# EAGLE board Linux_Board_v895 (EAGLE 9.7.0), part 1 of 4
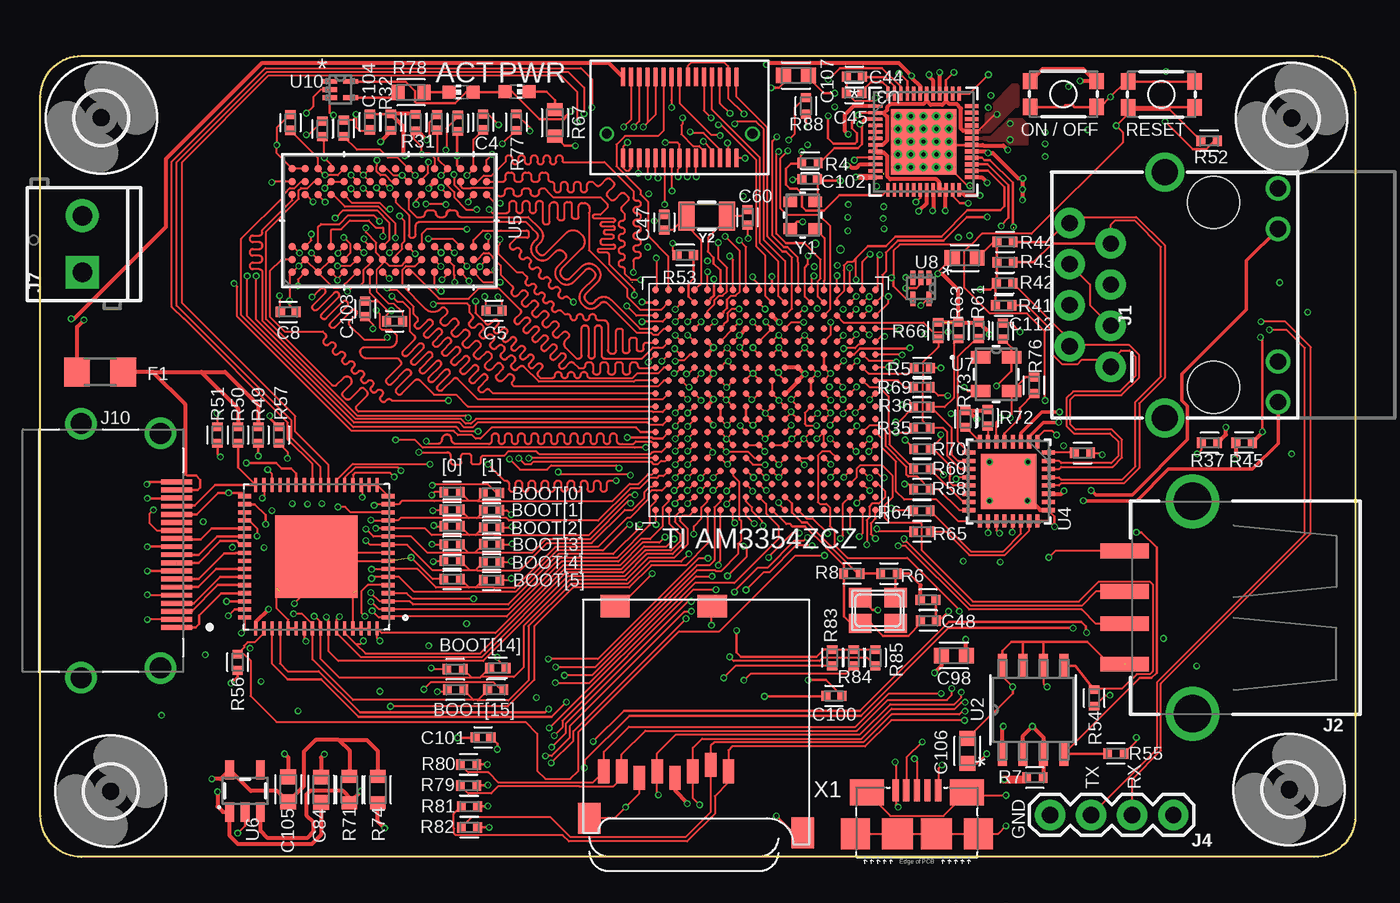
[diagram p0: board, top side]
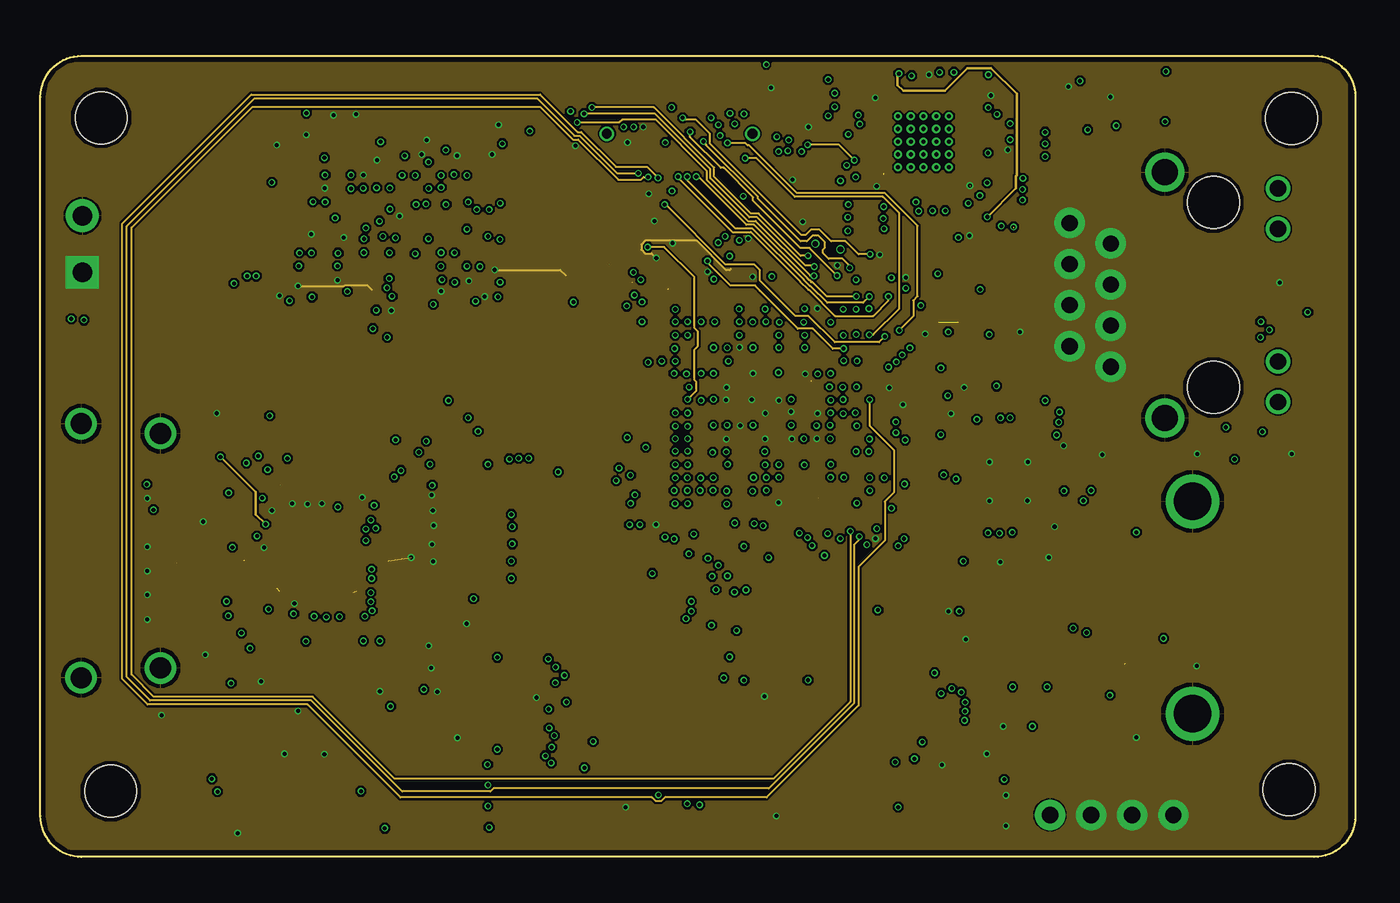
[diagram p1: board, inner layer Route2]
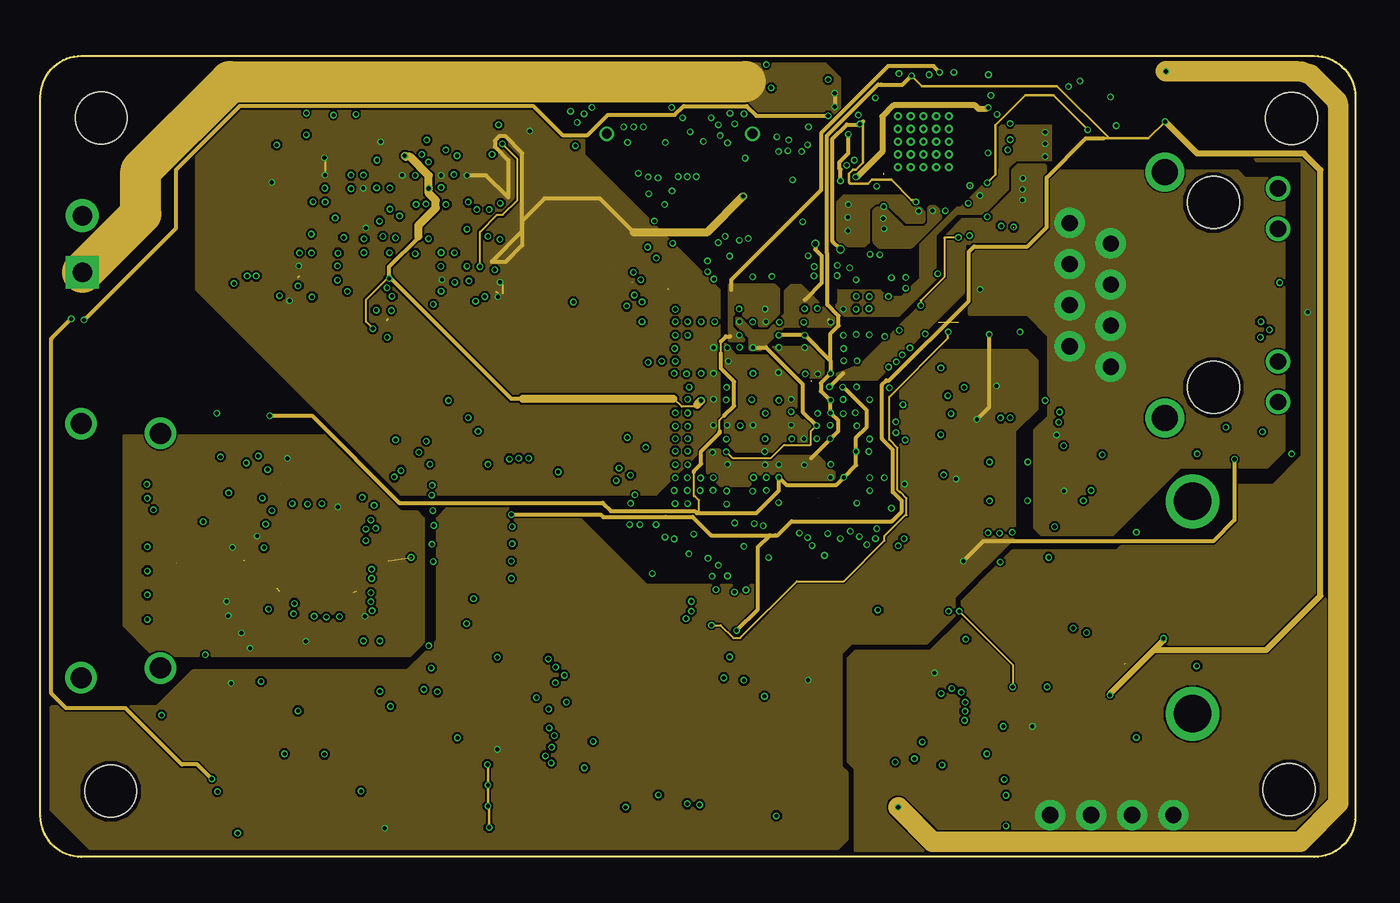
[diagram p2: board, inner layer Route15]
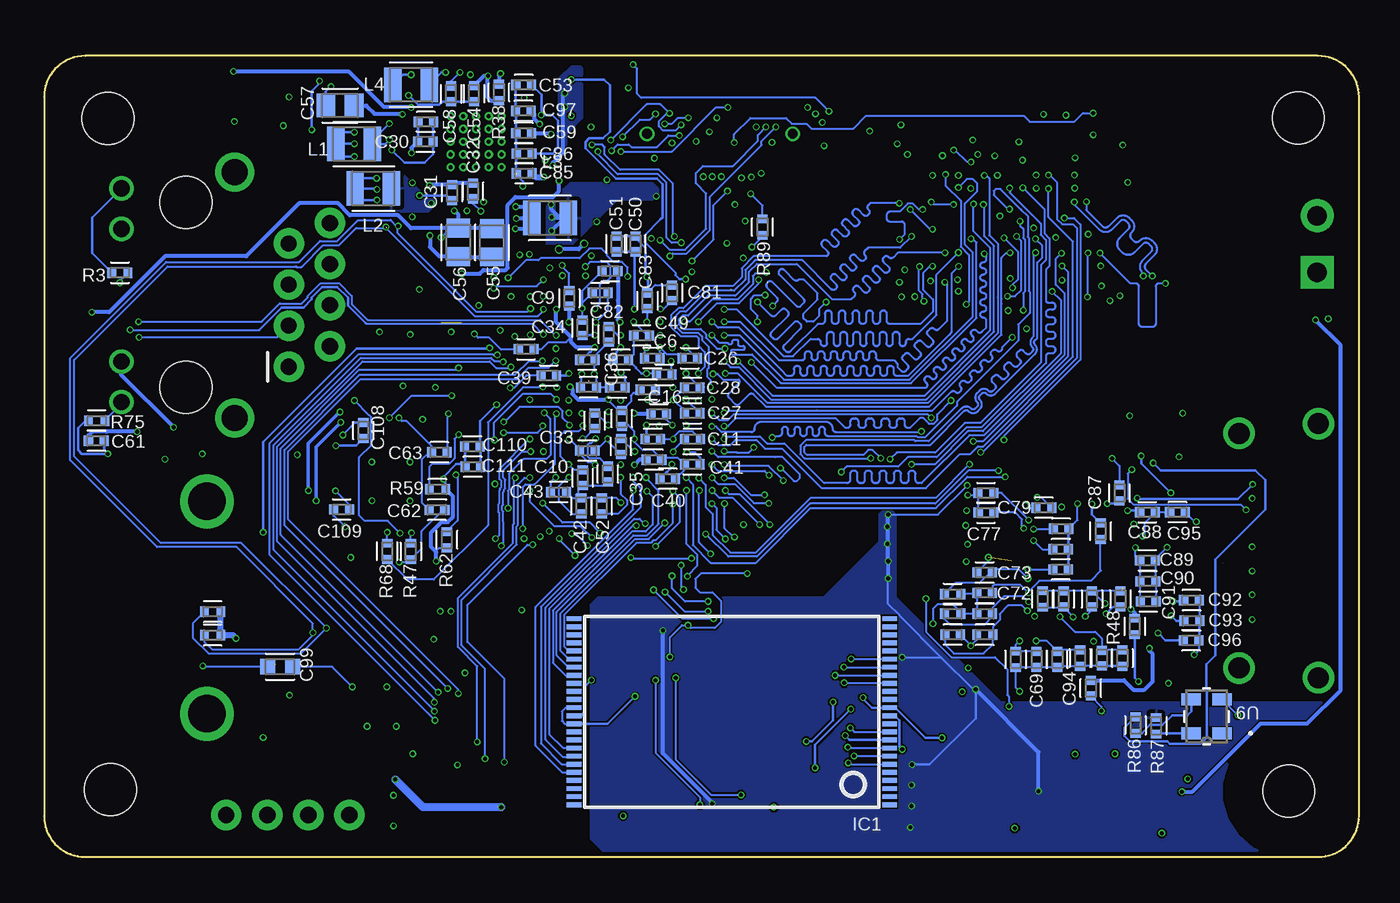
[diagram p3: board, bottom side, seen from below]

Size 81.28 x 49.53 mm. Coordinates in mm from the lower left corner, seen from the top.
Outline: 0,2.54 0,46.99 arc-90 2.54,49.53 78.74,49.53 arc-90 81.28,46.99 81.28,2.54 arc-90 78.74,0 2.54,0 arc-90 0,2.54
Copper layers (1+2*15+16): Top 0.035mm / dielectric 1.5mm / Route2 0.035mm / dielectric 0.15mm / Route15 0.035mm / dielectric 0.2mm / Bottom 0.035mm
Design rules "default *": minimum track width 4mil, minimum drill 10mil, track to track 4mil, track to pad 4mil, pad to pad 4mil, via to via 4mil, smd to smd 3mil, copper to edge 10mil, drill to drill 6mil, minimum pad ring 5mil, minimum via ring 3mil, stop-mask expansion 2mil, vias tented up to drill 25mil, thermal gap 10mil

## Footprints (pad centres in the part's own frame; a part is rotated, then mirrored left to right if it is on the bottom)
CAPC1005X60 = smd 0.56 x 0.629: 1 -0.485,0; 2 0.485,0
CAPC2012X110 = smd 1.165 x 1.465: 1 -0.875,0; 2 0.875,0
CAPC1608X85 = smd 0.921 x 0.97: 1 -0.775,0; 2 0.775,0
R1206 = smd 1.6 x 1.803: 1 -1.422,0; 2 1.422,0
3,2 = hole 3.2: 0,0
TSOP48 = smd 0.9 x 0.3: 1 -9.75,5.75; 2 -9.75,5.25; 3 -9.75,4.75; 4 -9.75,4.25; 5 -9.75,3.75; 6 -9.75,3.25; 7 -9.75,2.75; 8 -9.75,2.25; 9 -9.75,1.75; 10 -9.75,1.25; 11 -9.75,0.75; 12 -9.75,0.25; 13 -9.75,-0.25; 14 -9.75,-0.75; 15 -9.75,-1.25; 16 -9.75,-1.75; 17 -9.75,-2.25; 18 -9.75,-2.75; 19 -9.75,-3.25; 20 -9.75,-3.75; 21 -9.75,-4.25; 22 -9.75,-4.75; 23 -9.75,-5.25; 24 -9.75,-5.75; 25 9.75,-5.75; 26 9.75,-5.25; 27 9.75,-4.75; 28 9.75,-4.25; 29 9.75,-3.75; 30 9.75,-3.25; 31 9.75,-2.75; 32 9.75,-2.25; 33 9.75,-1.75; 34 9.75,-1.25; 35 9.75,-0.75; 36 9.75,-0.25; 37 9.75,0.25; 38 9.75,0.75; 39 9.75,1.25; 40 9.75,1.75; 41 9.75,2.25; 42 9.75,2.75; 43 9.75,3.25; 44 9.75,3.75; 45 9.75,4.25; 46 9.75,4.75; 47 9.75,5.25; 48 9.75,5.75
MAGJACK = drill 1 pad 1.88: 1 3.175,17.445; 2 4.445,19.985; 3 5.715,17.445; 4 6.985,19.985; 5 8.255,17.445; 6 9.525,19.985; 7 10.795,17.445; 8 12.065,19.985 | drill 1 pad 1.27: 9 1,7.1; 10 3.5,7.1; 11 11.7,7.1; 12 14.2,7.1 | drill 1.6 pad 2.184: M1 0,14.1; M2 15.2,14.1 | hole 3.2: 1.905,11.095; 13.335,11.095
USB-A-S-SILK-FEMALE = smd 3 x 0.9: D+ 7.212,-1; D- 7.212,1; GND 7.212,-3.5; VBUS 7.212,3.5 | drill 2.311: SHLD1 3,-6.566; SHLD2 3,6.566
1X04 = drill 1.016 pad 1.88: 1 0,0; 2 2.54,0; 3 5.08,0; 4 7.62,0
SCREWTERMINAL-3.5MM-2 = drill 1.2 pad 2.032 square: 1 0,0 | drill 1.2 pad 2.032: 2 3.5,0
AMPHENOL_10029449-001RLF = smd 0.3 x 1.9: 1 4.75,1; 2 4.25,1; 3 3.75,1; 4 3.25,1; 5 2.75,1; 6 2.25,1; 7 1.75,1; 8 1.25,1; 9 0.75,1; 10 0.25,1; 11 -0.25,1; 12 -0.75,1; 13 -1.25,1; 14 -1.75,1; 15 -2.25,1; 16 -2.75,1; 17 -3.25,1; 18 -3.75,1; 19 -4.25,1 | drill 1.3: S1 7.25,0; S2 -7.25,0; S3 -7.85,-4.9; S4 7.85,-4.9
INDC2520X120N = smd 1.079 x 2.129: 1 -1.125,0; 2 1.125,0
CHIP-LED0603 = smd 0.8 x 0.8: A 0,-0.75; C 0,0.75
NX3225 = smd 1.4 x 1.2: 1 -1.1,-0.8; 2 1.1,-0.8; 3 1.1,0.8; 4 -1.1,0.8
RESC1005X40 = smd 0.535 x 0.644: 1 -0.507,0; 2 0.507,0
RESC1608X60 = smd 0.799 x 0.974: 1 -0.815,0; 2 0.815,0
TACTILE_SWITCH_SMD_4.6X2.8MM = smd 0.9 x 1: 1 -2.05,-0.8; 2 2.05,-0.8; 3 2.05,0.8; 4 -2.05,0.8
QFN50P900X900X100-65N = smd 0.86 x 0.26: 1 -4.435,3.75; 2 -4.435,3.25; 3 -4.435,2.75; 4 -4.435,2.25; 5 -4.435,1.75; 6 -4.435,1.25; 7 -4.435,0.75; 8 -4.435,0.25; 9 -4.435,-0.25; 10 -4.435,-0.75; 11 -4.435,-1.25; 12 -4.435,-1.75; 13 -4.435,-2.25; 14 -4.435,-2.75; 15 -4.435,-3.25; 16 -4.435,-3.75; 33 4.435,-3.75; 34 4.435,-3.25; 35 4.435,-2.75; 36 4.435,-2.25; 37 4.435,-1.75; 38 4.435,-1.25; 39 4.435,-0.75; 40 4.435,-0.25; 41 4.435,0.25; 42 4.435,0.75; 43 4.435,1.25; 44 4.435,1.75; 45 4.435,2.25; 46 4.435,2.75; 47 4.435,3.25; 48 4.435,3.75 | smd 0.26 x 0.86: 17 -3.75,-4.435; 18 -3.25,-4.435; 19 -2.75,-4.435; 20 -2.25,-4.435; 21 -1.75,-4.435; 22 -1.25,-4.435; 23 -0.75,-4.435; 24 -0.25,-4.435; 25 0.25,-4.435; 26 0.75,-4.435; 27 1.25,-4.435; 28 1.75,-4.435; 29 2.25,-4.435; 30 2.75,-4.435; 31 3.25,-4.435; 32 3.75,-4.435; 49 3.75,4.435; 50 3.25,4.435; 51 2.75,4.435; 52 2.25,4.435; 53 1.75,4.435; 54 1.25,4.435; 55 0.75,4.435; 56 0.25,4.435; 57 -0.25,4.435; 58 -0.75,4.435; 59 -1.25,4.435; 60 -1.75,4.435; 61 -2.25,4.435; 62 -2.75,4.435; 63 -3.25,4.435; 64 -3.75,4.435 | smd 5.1 x 5.1: 65 0,0
D8_TEX = smd 1.46 x 0.559: 1 -2.724,1.905; 2 -2.724,0.635; 3 -2.724,-0.635; 4 -2.724,-1.905; 5 2.724,-1.905; 6 2.724,-0.635; 7 2.724,0.635; 8 2.724,1.905
RSL48_4P05X4P05 = smd 0.85 x 0.2: 1 -2.975,2.2; 2 -2.975,1.8; 3 -2.975,1.4; 4 -2.975,1; 5 -2.975,0.6; 6 -2.975,0.2; 7 -2.975,-0.2; 8 -2.975,-0.6; 9 -2.975,-1; 10 -2.975,-1.4; 11 -2.975,-1.8; 12 -2.975,-2.2; 25 2.975,-2.2; 26 2.975,-1.8; 27 2.975,-1.4; 28 2.975,-1; 29 2.975,-0.6; 30 2.975,-0.2; 31 2.975,0.2; 32 2.975,0.6; 33 2.975,1; 34 2.975,1.4; 35 2.975,1.8; 36 2.975,2.2 | smd 0.2 x 0.85: 13 -2.2,-2.975; 14 -1.8,-2.975; 15 -1.4,-2.975; 16 -1,-2.975; 17 -0.6,-2.975; 18 -0.2,-2.975; 19 0.2,-2.975; 20 0.6,-2.975; 21 1,-2.975; 22 1.4,-2.975; 23 1.8,-2.975; 24 2.2,-2.975; 37 2.2,2.975; 38 1.8,2.975; 39 1.4,2.975; 40 1,2.975; 41 0.6,2.975; 42 0.2,2.975; 43 -0.2,2.975; 44 -0.6,2.975; 45 -1,2.975; 46 -1.4,2.975; 47 -1.8,2.975; 48 -2.2,2.975 | smd 4.05 x 4.05: 49 0,0 | drill 0.254 pad 0.508: V -1.575,-1.575; V_1 -1.575,-0.787; V_2 -1.575,0; V_3 -1.575,0.787; V_4 -1.575,1.575; V_5 -0.787,-1.575; V_6 -0.787,-0.787; V_7 -0.787,0; V_8 -0.787,0.787; V_9 -0.787,1.575; V_10 0,-1.575; V_11 0,-0.787; V_12 0,0; V_13 0,0.787; V_14 0,1.575; V_15 0.787,-1.575; V_16 0.787,-0.787; V_17 0.787,0; V_18 0.787,0.787; V_19 0.787,1.575; V_20 1.575,-1.575; V_21 1.575,-0.787; V_22 1.575,0; V_23 1.575,0.787; V_24 1.575,1.575
QFN32_5X5MC_MCH = smd 0.813 x 0.254: 1 -2.451,1.778; 2 -2.451,1.27; 3 -2.451,0.762; 4 -2.451,0.254; 5 -2.451,-0.254; 6 -2.451,-0.762; 7 -2.451,-1.27; 8 -2.451,-1.778; 17 2.451,-1.778; 18 2.451,-1.27; 19 2.451,-0.762; 20 2.451,-0.254; 21 2.451,0.254; 22 2.451,0.762; 23 2.451,1.27; 24 2.451,1.778 | smd 0.254 x 0.813: 9 -1.778,-2.451; 10 -1.27,-2.451; 11 -0.762,-2.451; 12 -0.254,-2.451; 13 0.254,-2.451; 14 0.762,-2.451; 15 1.27,-2.451; 16 1.778,-2.451; 25 1.778,2.451; 26 1.27,2.451; 27 0.762,2.451; 28 0.254,2.451; 29 -0.254,2.451; 30 -0.762,2.451; 31 -1.27,2.451; 32 -1.778,2.451 | smd 3.404 x 3.404: 33 0,0
FBGA96_9X14_MRN = smd 0.457 x 0.457: A1 -3.2,6; A2 -2.4,6; A3 -1.6,6; A7 1.6,6; A8 2.4,6; A9 3.2,6; B1 -3.2,5.2; B2 -2.4,5.2; B3 -1.6,5.2; B7 1.6,5.2; B8 2.4,5.2; B9 3.2,5.2; C1 -3.2,4.4; C2 -2.4,4.4; C3 -1.6,4.4; C7 1.6,4.4; C8 2.4,4.4; C9 3.2,4.4; D1 -3.2,3.6; D2 -2.4,3.6; D3 -1.6,3.6; D7 1.6,3.6; D8 2.4,3.6; D9 3.2,3.6; E1 -3.2,2.8; E2 -2.4,2.8; E3 -1.6,2.8; E7 1.6,2.8; E8 2.4,2.8; E9 3.2,2.8; F1 -3.2,2; F2 -2.4,2; F3 -1.6,2; F7 1.6,2; F8 2.4,2; F9 3.2,2; G1 -3.2,1.2; G2 -2.4,1.2; G3 -1.6,1.2; G7 1.6,1.2; G8 2.4,1.2; G9 3.2,1.2; H1 -3.2,0.4; H2 -2.4,0.4; H3 -1.6,0.4; H7 1.6,0.4; H8 2.4,0.4; H9 3.2,0.4; J1 -3.2,-0.4; J2 -2.4,-0.4; J3 -1.6,-0.4; J7 1.6,-0.4; J8 2.4,-0.4; J9 3.2,-0.4; K1 -3.2,-1.2; K2 -2.4,-1.2; K3 -1.6,-1.2; K7 1.6,-1.2; K8 2.4,-1.2; K9 3.2,-1.2; L1 -3.2,-2; L2 -2.4,-2; L3 -1.6,-2; L7 1.6,-2; L8 2.4,-2; L9 3.2,-2; M1 -3.2,-2.8; M2 -2.4,-2.8; M3 -1.6,-2.8; M7 1.6,-2.8; M8 2.4,-2.8; M9 3.2,-2.8; N1 -3.2,-3.6; N2 -2.4,-3.6; N3 -1.6,-3.6; N7 1.6,-3.6; N8 2.4,-3.6; N9 3.2,-3.6; P1 -3.2,-4.4; P2 -2.4,-4.4; P3 -1.6,-4.4; P7 1.6,-4.4; P8 2.4,-4.4; P9 3.2,-4.4; R1 -3.2,-5.2; R2 -2.4,-5.2; R3 -1.6,-5.2; R7 1.6,-5.2; R8 2.4,-5.2; R9 3.2,-5.2; T1 -3.2,-6; T2 -2.4,-6; T3 -1.6,-6; T7 1.6,-6; T8 2.4,-6; T9 3.2,-6
SOT23-5 = smd 0.55 x 1.2: 1 -0.95,-1.3; 2 0,-1.3; 3 0.95,-1.3; 4 0.95,1.3; 5 -0.95,1.3
CDFN4_3P2X2P5_MCH = smd 1.205 x 0.749: 1 -0.952,1.05; 2 -0.952,-1.05; 3 0.952,-1.05; 4 0.952,1.05
DRL5 = smd 0.914 x 0.305: 1 -0.648,0.5; 2 -0.648,0; 3 -0.648,-0.5; 4 0.648,-0.5; 5 0.648,0.5
AM3354_SMALL_PADS = smd 0.4 x 0.4: A1 0,13.6; A2 0.8,13.6; A3 1.6,13.6; A4 2.4,13.6; A5 3.2,13.6; A6 4,13.6; A7 4.8,13.6; A8 5.6,13.6; A9 6.4,13.6; A10 7.2,13.6; A11 8,13.6; A12 8.8,13.6; A13 9.6,13.6; A14 10.4,13.6; A15 11.2,13.6; A16 12,13.6; A17 12.8,13.6; A18 13.6,13.6; B1 0,12.8; B2 0.8,12.8; B3 1.6,12.8; B4 2.4,12.8; B5 3.2,12.8; B6 4,12.8; B7 4.8,12.8; B8 5.6,12.8; B9 6.4,12.8; B10 7.2,12.8; B11 8,12.8; B12 8.8,12.8; B13 9.6,12.8; B14 10.4,12.8; B15 11.2,12.8; B16 12,12.8; B17 12.8,12.8; B18 13.6,12.8; C1 0,12; C2 0.8,12; C3 1.6,12; C4 2.4,12; C5 3.2,12; C6 4,12; C7 4.8,12; C8 5.6,12; C9 6.4,12; C10 7.2,12; C11 8,12; C12 8.8,12; C13 9.6,12; C14 10.4,12; C15 11.2,12; C16 12,12; C17 12.8,12; C18 13.6,12; D1 0,11.2; D2 0.8,11.2; D3 1.6,11.2; D4 2.4,11.2; D5 3.2,11.2; D6 4,11.2; D7 4.8,11.2; D8 5.6,11.2; D9 6.4,11.2; D10 7.2,11.2; D11 8,11.2; D12 8.8,11.2; D13 9.6,11.2; D14 10.4,11.2; D15 11.2,11.2; D16 12,11.2; D17 12.8,11.2; D18 13.6,11.2; E1 0,10.4; E2 0.8,10.4; E3 1.6,10.4; E4 2.4,10.4; E5 3.2,10.4; E6 4,10.4; E7 4.8,10.4; E8 5.6,10.4; E9 6.4,10.4; E10 7.2,10.4; E11 8,10.4; E12 8.8,10.4; E13 9.6,10.4; E14 10.4,10.4; E15 11.2,10.4; E16 12,10.4; E17 12.8,10.4; E18 13.6,10.4; F1 0,9.6; F2 0.8,9.6; F3 1.6,9.6; F4 2.4,9.6; F5 3.2,9.6; F6 4,9.6; F7 4.8,9.6; F8 5.6,9.6; F9 6.4,9.6; F10 7.2,9.6; F11 8,9.6; F12 8.8,9.6; F13 9.6,9.6; F14 10.4,9.6; F15 11.2,9.6; F16 12,9.6; F17 12.8,9.6; F18 13.6,9.6; G1 0,8.8; G2 0.8,8.8; G3 1.6,8.8; G4 2.4,8.8; G5 3.2,8.8; G6 4,8.8; G7 4.8,8.8; G8 5.6,8.8; G9 6.4,8.8; G10 7.2,8.8; G11 8,8.8; G12 8.8,8.8; G13 9.6,8.8; G14 10.4,8.8; G15 11.2,8.8; G16 12,8.8; G17 12.8,8.8; G18 13.6,8.8; H1 0,8; H2 0.8,8; H3 1.6,8; H4 2.4,8; H5 3.2,8; H6 4,8; H7 4.8,8; H8 5.6,8; H9 6.4,8; H10 7.2,8; H11 8,8; H12 8.8,8; H13 9.6,8; H14 10.4,8; H15 11.2,8; H16 12,8; H17 12.8,8; H18 13.6,8; J1 0,7.2; J2 0.8,7.2; J3 1.6,7.2; J4 2.4,7.2; J5 3.2,7.2; J6 4,7.2; J7 4.8,7.2; J8 5.6,7.2; J9 6.4,7.2; J10 7.2,7.2; J11 8,7.2; J12 8.8,7.2; J13 9.6,7.2; J14 10.4,7.2; J15 11.2,7.2; J16 12,7.2; J17 12.8,7.2; J18 13.6,7.2; K1 0,6.4; K2 0.8,6.4; K3 1.6,6.4; K4 2.4,6.4; K5 3.2,6.4; K6 4,6.4; K7 4.8,6.4; K8 5.6,6.4; K9 6.4,6.4; K10 7.2,6.4; K11 8,6.4; K12 8.8,6.4; K13 9.6,6.4; K14 10.4,6.4; K15 11.2,6.4; K16 12,6.4; K17 12.8,6.4; K18 13.6,6.4; L1 0,5.6; L2 0.8,5.6; L3 1.6,5.6; L4 2.4,5.6; L5 3.2,5.6; L6 4,5.6; L7 4.8,5.6; L8 5.6,5.6; L9 6.4,5.6; L10 7.2,5.6; L11 8,5.6; L12 8.8,5.6; L13 9.6,5.6; L14 10.4,5.6; L15 11.2,5.6; L16 12,5.6; L17 12.8,5.6; L18 13.6,5.6; M1 0,4.8; M2 0.8,4.8; M3 1.6,4.8; M4 2.4,4.8; M5 3.2,4.8; M6 4,4.8; M7 4.8,4.8; M8 5.6,4.8; M9 6.4,4.8; M10 7.2,4.8; M11 8,4.8; M12 8.8,4.8; M13 9.6,4.8; M14 10.4,4.8; M15 11.2,4.8; M16 12,4.8; M17 12.8,4.8; M18 13.6,4.8; N1 0,4; N2 0.8,4; N3 1.6,4; N4 2.4,4; N5 3.2,4; N6 4,4; N7 4.8,4; N8 5.6,4; N9 6.4,4; N10 7.2,4; N11 8,4; N12 8.8,4; N13 9.6,4; N14 10.4,4; N15 11.2,4; N16 12,4; N17 12.8,4; N18 13.6,4; P1 0,3.2; P2 0.8,3.2; P3 1.6,3.2; P4 2.4,3.2; P5 3.2,3.2; P6 4,3.2; P7 4.8,3.2; P8 5.6,3.2; P9 6.4,3.2; P10 7.2,3.2; P11 8,3.2; P12 8.8,3.2; P13 9.6,3.2; P14 10.4,3.2; P15 11.2,3.2; P16 12,3.2; P17 12.8,3.2; P18 13.6,3.2; R1 0,2.4; R2 0.8,2.4; R3 1.6,2.4; R4 2.4,2.4; R5 3.2,2.4; R6 4,2.4; R7 4.8,2.4; R8 5.6,2.4; R9 6.4,2.4; R10 7.2,2.4; R11 8,2.4; R12 8.8,2.4; R13 9.6,2.4; R14 10.4,2.4; R15 11.2,2.4; R16 12,2.4; R17 12.8,2.4; R18 13.6,2.4; T1 0,1.6; T2 0.8,1.6; T3 1.6,1.6; T4 2.4,1.6; T5 3.2,1.6; T6 4,1.6; T7 4.8,1.6; T8 5.6,1.6; T9 6.4,1.6; T10 7.2,1.6; T11 8,1.6; T12 8.8,1.6; T13 9.6,1.6; T14 10.4,1.6; T15 11.2,1.6; T16 12,1.6; T17 12.8,1.6; T18 13.6,1.6; U1 0,0.8; U2 0.8,0.8; U3 1.6,0.8; U4 2.4,0.8; U5 3.2,0.8; U6 4,0.8; U7 4.8,0.8; U8 5.6,0.8; U9 6.4,0.8; U10 7.2,0.8; U11 8,0.8; U12 8.8,0.8; U13 9.6,0.8; U14 10.4,0.8; U15 11.2,0.8; U16 12,0.8; U17 12.8,0.8; U18 13.6,0.8; V1 0,0; V2 0.8,0; V3 1.6,0; V4 2.4,0; V5 3.2,0; V6 4,0; V7 4.8,0; V8 5.6,0; V9 6.4,0; V10 7.2,0; V11 8,0; V12 8.8,0; V13 9.6,0; V14 10.4,0; V15 11.2,0; V16 12,0; V17 12.8,0; V18 13.6,0
MICROSD = smd 0.7 x 1.5: 1 9,-10.64; 2 7.9,-10.24; 3 6.8,-10.64; 4 5.7,-11.04; 5 4.6,-10.64; 6 3.5,-11.04; 7 2.4,-10.64; 8 1.3,-10.64 | smd 1.8 x 1.4: CD1 2,-0.44; CD2 8,-0.44 | smd 1.4 x 1.9: MT1 0.4,-13.54; MT2 13.6,-14.44
30-POS = smd 1.15 x 0.25: P$1 0,0; P$2 0,0.5; P$3 0,1; P$4 0,1.5; P$5 0,2; P$6 0,2.5; P$7 0,3; P$8 0,3.5; P$9 0,4; P$10 0,4.5; P$11 0,5; P$12 0,5.5; P$13 0,6; P$14 0,6.5; P$15 0,7; P$16 5,0; P$17 5,0.5; P$18 5,1; P$19 5,1.5; P$20 5,2; P$21 5,2.5; P$22 5,3; P$23 5,3.5; P$24 5,4; P$25 5,4.5; P$26 5,5; P$27 5,5.5; P$28 5,6; P$29 5,6.5; P$30 5,7 | drill 0.6: P$31 1.5,-1; P$32 1.5,8
BEADC1608X95N = smd 0.9 x 0.97: 1 -0.785,0 | smd 0.933 x 0.97: 2 0.769,0
GHI-CONNECTORS_10118192-0001LF(MICRO-USB-B-AMPHENOL-FCI) = smd 1.8 x 1.9: CGND1 -3.8,0; CGND4 3.8,0 | smd 1.9 x 1.9: CGND2 -1.2,0; CGND3 1.2,0 | smd 2.1 x 1.6: CGND5 3.1,2.55; CGND6 -3.1,2.55 | smd 0.4 x 1.35: D+ 0,2.675; D- -0.65,2.675; GND 1.3,2.675; ID 0.65,2.675; VBUS -1.3,2.675
ASDMB = smd 0.838 x 0.66: 1 -0.775,0.826; 2 -0.775,-0.826; 3 0.775,-0.826; 4 0.775,0.826
CRYSTAL-SMD-3.2X1.5MM = smd 1 x 1.8: P$1 -1.25,0; P$2 1.25,0

## Placement (x,y rotation side)
C1  100nF  [CAPC1005X60]  17.43,45.01 90 top
C2  100nF  [CAPC1005X60]  24.51,45.41 90 top
C3  100nF  [CAPC1005X60]  15.45,45.4 90 top
C4  100nF  [CAPC1005X60]  27.36,45.43 90 top
C5  100nF  [CAPC1005X60]  28.04,33.78 180 top
C6  100nF  [CAPC1005X60]  43.69,30.84 0 bottom
C7  100nF  [CAPC1005X60]  21.89,33.12 180 top
C8  100nF  [CAPC1005X60]  15.32,33.71 180 top
C9  100nF  [CAPC1005X60]  48.82,34.54 90 bottom
C10  100nF  [CAPC1005X60]  47.98,23.44 270 bottom
C11  100nF  [CAPC1005X60]  41.2,25.83 0 bottom
C12  100nF  [CAPC1005X60]  45.64,30.73 0 bottom
C13  100nF  [CAPC1005X60]  47.7,30.73 0 bottom
C14  100nF  [CAPC1005X60]  51.49,31.39 180 bottom
C15  100nF  [CAPC1005X60]  47.63,29.03 0 bottom
C16  100nF  [CAPC1005X60]  42.95,29.82 180 bottom
C17  100nF  [CAPC1005X60]  43.28,27.38 180 bottom
C18  100nF  [CAPC1005X60]  45.62,25.37 270 bottom
C19  100nF  [CAPC1005X60]  45.85,29.03 180 bottom
C20  100nF  [CAPC1005X60]  57.68,45.44 0 bottom
C21  100nF  [CAPC1005X60]  43.96,28.88 0 bottom
C22  100nF  [CAPC1005X60]  45.57,27.11 270 bottom
C23  100nF  [CAPC1005X60]  43.66,25.83 0 bottom
C24  100nF  [CAPC1005X60]  47.24,26.97 270 bottom
C25  100nF  [CAPC1005X60]  46.43,23.67 270 bottom
C26  100nF  [CAPC1005X60]  41.38,30.84 180 bottom
C27  100nF  [CAPC1005X60]  41.22,27.43 180 bottom
C28  100nF  [CAPC1005X60]  41.22,29.01 180 bottom
C30  10uF  [CAPC1005X60]  57.72,44.22 180 bottom
C31  10uF  [CAPC1005X60]  56.06,41.07 270 bottom
C32  10uF  [CAPC1005X60]  54.76,41.17 270 bottom
C33  100nF  [CAPC1005X60]  47.7,25.12 0 bottom
C34  100nF  [CAPC1005X60]  48.01,32.72 90 bottom
C35  100nF  [CAPC1005X60]  43.59,24.56 0 bottom
C36  100nF  [CAPC1005X60]  46.38,32.31 270 bottom
C39  100nF  [CAPC1005X60]  50.09,29.77 180 bottom
C40  100nF  [CAPC1005X60]  42.73,23.39 0 bottom
C41  100nF  [CAPC1005X60]  41.22,24.28 180 bottom
C42  1uF  [CAPC1005X60]  48.08,21.7 90 bottom
C43  1uF  [CAPC1005X60]  49.48,22.56 0 bottom
C44  10uF  [CAPC1005X60]  50.32,48.23 180 top
C45  100nF  [CAPC1005X60]  50.3,47.24 180 top
C46  18pF  [CAPC1005X60]  54.86,15.9 0 top
C47  18pF  [CAPC1005X60]  38.56,39.24 90 top
C48  18pF  [CAPC1005X60]  54.89,14.61 0 top
C49  1uF  [CAPC1005X60]  44.35,32.23 0 bottom
C50  100nF  [CAPC1005X60]  44.73,37.9 270 bottom
C51  1uF  [CAPC1005X60]  45.9,37.9 270 bottom
C52  1uF  [CAPC1005X60]  46.81,21.7 270 bottom
C53  4.7uF  [CAPC1005X60]  51.64,47.73 0 bottom
C54  10uF  [CAPC1005X60]  54.71,47.19 90 bottom
C55  10uF  [CAPC2012X110]  53.59,37.97 270 bottom
C56  10uF  [CAPC2012X110]  55.68,38 270 bottom
C57  10uF  [CAPC2012X110]  62.99,46.46 180 bottom
C58  10uF  [CAPC1005X60]  56.13,47.18 90 bottom
C59  2.2uF  [CAPC1005X60]  51.64,44.75 0 bottom
C60  18pF  [CAPC1005X60]  43.71,39.55 270 top
C61  22nF  [CAPC1005X60]  78.05,25.73 0 bottom
C62  100nF  [CAPC1005X60]  57,21.46 0 bottom
C63  1uF  [CAPC1005X60]  56.85,25.02 0 bottom
C64  47pF  [CAPC1005X60]  14.76,15.95 90 bottom
C65  47pF  [CAPC1005X60]  16.51,15.95 90 bottom
C66  47pF  [CAPC1005X60]  18.26,15.95 90 bottom
C67  47pF  [CAPC1005X60]  15.9,12.29 270 bottom
C68  47pF  [CAPC1005X60]  18.64,12.22 270 bottom
C69  47pF  [CAPC1005X60]  19.94,12.22 270 bottom
C70  47pF  [CAPC1005X60]  25.12,13.74 0 bottom
C71  47pF  [CAPC1005X60]  23.14,15.04 180 bottom
C72  47pF  [CAPC1005X60]  23.14,16.33 180 bottom
C73  47pF  [CAPC1005X60]  23.14,17.59 180 bottom
C74  47pF  [CAPC1005X60]  18.44,17.78 0 bottom
C75  47pF  [CAPC1005X60]  18.44,19.02 0 bottom
C76  47pF  [CAPC1005X60]  18.41,20.29 0 bottom
C77  47pF  [CAPC1005X60]  23.06,21.29 180 bottom
C78  47pF  [CAPC1005X60]  23.07,22.5 180 bottom
C79  47pF  [CAPC1005X60]  19.48,21.59 0 bottom
C80  1uF  [CAPC1005X60]  46.3,36.22 180 bottom
C81  1uF  [CAPC1005X60]  42.47,34.87 90 bottom
C82  1uF  [CAPC1005X60]  46.91,34.87 180 bottom
C83  1uF  [CAPC1005X60]  43.99,34.39 90 bottom
C84  1uF  [CAPC1608X85]  17.35,4.17 90 top
C85  4.7uF  [CAPC1005X60]  51.61,42.27 0 bottom
C86  22uF  [CAPC1005X60]  51.61,43.48 0 bottom
C87  1uF  [CAPC1005X60]  14.81,22.5 270 bottom
C88  1uF  [CAPC1005X60]  13.08,21.31 180 bottom
C89  1uF  [CAPC1005X60]  13.08,18.34 180 bottom
C90  1uF  [CAPC1005X60]  13.06,17.04 180 bottom
C91  1uF  [CAPC1005X60]  13.03,15.8 180 bottom
C92  1uF  [CAPC1005X60]  10.36,15.88 0 bottom
C93  1uF  [CAPC1005X60]  10.34,14.61 0 bottom
C94  1uF  [CAPC1005X60]  16.58,10.43 270 bottom
C95  1uF  [CAPC1005X60]  11.23,21.31 0 bottom
C96  1uF  [CAPC1005X60]  10.39,13.39 0 bottom
C97  2.2uF  [CAPC1005X60]  51.65,46.13 0 bottom
C98  100nF  [CAPC1608X85]  56.46,12.45 0 top
C99  120uF  [CAPC1608X85]  66.7,11.76 180 bottom
C100  1uF  [CAPC1005X60]  49.05,9.96 180 top
C101  1uF  [CAPC1005X60]  27.36,7.39 180 top
C102  1uF  [CAPC1005X60]  47.55,41.91 180 top
C103  100nF  [CAPC1005X60]  20.07,33.88 90 top
C104  100nF  [CAPC1005X60]  20.36,45.44 270 top
C105  1uF  [CAPC1608X85]  15.32,4.19 90 top
C106  100nF  [CAPC1608X85]  57.3,6.55 270 top
C107  22uF  [CAPC1608X85]  46.71,48.31 180 top
C108  1uF  [CAPC1005X60]  61.54,26.37 270 bottom
C109  1uF  [CAPC1005X60]  62.89,21.49 180 bottom
C110  100nF  [CAPC1005X60]  54.81,25.37 0 bottom
C111  1uF  [CAPC1005X60]  54.79,24.13 0 bottom
C112  [CAPC1005X60]  59.49,32.51 90 top
F1  [R1206]  3.68,29.99 180 top
H1  MOUNT-HOLE3.2  [3,2]  77.19,4.17 0 top
H2  MOUNT-HOLE3.2  [3,2]  3.76,45.69 0 top
H3  MOUNT-HOLE3.2  [3,2]  77.34,45.67 0 top
H4  MOUNT-HOLE3.2  [3,2]  4.34,4.06 0 top
IC1  MT29F8G08DAA  [TSOP48]  38.77,8.98 180 bottom
J1  MAGJACK  [MAGJACK]  83.6,27.13 90 top
J2  USB_A_SMT_FEMALE  [USB-A-S-SILK-FEMALE]  74.22,15.42 180 top
J4  UART0  [1X04]  62.41,2.6 0 top
J7  [SCREWTERMINAL-3.5MM-2]  2.59,36.14 90 top
J10  10029449-001RLF  [AMPHENOL_10029449-001RLF]  7.42,18.93 270 top
L1  2.2uH  [INDC2520X120N]  62.11,44.08 180 bottom
L2  2.2uH  [INDC2520X120N]  60.93,41.33 180 bottom
L3  2.2uH  [INDC2520X120N]  50.01,39.5 0 bottom
L4  18uH  [INDC2520X120N]  58.6,47.74 0 bottom
LED1  [CHIP-LED0603]  29.47,47.32 270 top
LED2  [CHIP-LED0603]  26,47.29 90 top
Q2  [NX3225]  51.77,15.24 0 top
R1  10k  [RESC1005X40]  70.87,15.16 0 bottom
R2  10k  [RESC1005X40]  70.87,13.72 0 bottom
R3  270R  [RESC1005X40]  76.6,36.12 180 bottom
R4  100k  [RESC1005X40]  47.57,42.91 0 top
R5  33R  [RESC1005X40]  54.51,30.23 180 top
R6  0R  [RESC1005X40]  52.45,17.53 180 top
R7  0R  [RESC1005X40]  61.47,4.9 0 top
R8  1M  [RESC1005X40]  50.16,17.53 0 top
R9  10k  [RESC1005X40]  25.65,10.34 0 top
R10  10k  [RESC1005X40]  25.63,11.61 0 top
R11  10k  [RESC1005X40]  19.56,15.95 270 bottom
R12  10k  [RESC1005X40]  14.63,12.29 90 bottom
R13  10k  [RESC1005X40]  17.25,12.29 90 bottom
R14  10k  [RESC1005X40]  21.23,12.22 90 bottom
R15  10k  [RESC1005X40]  23.14,13.74 0 bottom
R16  10k  [RESC1005X40]  25.12,15.04 180 bottom
R17  10k  [RESC1005X40]  15.98,20.14 270 bottom
R18  10k  [RESC1005X40]  25.12,16.26 180 bottom
R19  10k  [RESC1005X40]  25.45,17.18 0 top
R20  10k  [RESC1005X40]  25.45,18.31 0 top
R21  10k  [RESC1005X40]  25.45,19.32 0 top
R22  10k  [RESC1005X40]  25.45,20.45 0 top
R23  10k  [RESC1005X40]  25.45,21.46 0 top
R24  10k  [RESC1005X40]  25.45,22.56 0 top
R25  10k  [RESC1005X40]  27.89,22.5 0 top
R26  10k  [RESC1005X40]  27.89,21.44 0 top
R27  10k  [RESC1005X40]  27.89,20.37 0 top
R28  10k  [RESC1005X40]  27.89,19.33 0 top
R29  10k  [RESC1005X40]  27.89,18.24 0 top
R30  10k  [RESC1005X40]  27.89,17.12 0 top
R31  10K  [RESC1005X40]  23.19,45.4 90 top
R32  10K  [RESC1005X40]  21.65,45.44 90 top
R33  10K  [RESC1005X40]  18.75,45.05 270 top
R34  10K  [RESC1005X40]  25.79,45.37 90 top
R35  33R  [RESC1005X40]  54.48,26.52 0 top
R36  33R  [RESC1005X40]  54.48,27.81 0 top
R37  270R  [RESC1005X40]  72.26,25.6 0 top
R38  10k  [RESC1005X40]  53.16,47.27 270 bottom
R39  10k  [RESC1005X40]  28.27,11.68 0 top
R40  10k  [RESC1005X40]  28.14,10.34 0 top
R41  49.9R  [RESC1005X40]  59.54,34.09 180 top
R42  49.9R  [RESC1005X40]  59.6,35.48 180 top
R43  49.9R  [RESC1005X40]  59.63,36.77 180 top
R44  49.9R  [RESC1005X40]  59.63,38.02 180 top
R45  10R  [RESC1005X40]  74.4,25.61 0 top
R46  12.1k  [RESC1005X40]  64.41,24.98 180 top
R47  1k  [RESC1005X40]  58.62,18.89 90 bottom
R48  0R  [RESC1005X40]  13.87,14.25 90 bottom
R49  10k  [RESC1005X40]  13.46,26.09 90 top
R50  10k  [RESC1005X40]  12.22,26.09 90 top
R51  10k  [RESC1005X40]  10.95,26.09 90 top
R52  4.7K  [RESC1005X40]  72.24,44.27 0 top
R53  10k  [RESC1005X40]  39.86,37.21 0 top
R54  10K  [RESC1005X40]  65.14,9.83 270 top
R55  10K  [RESC1005X40]  66.47,6.4 0 top
R56  10k  [RESC1005X40]  12.19,12.04 270 top
R57  0R  [RESC1005X40]  14.73,26.09 90 top
R58  10k  [RESC1005X40]  54.48,22.73 0 top
R59  10k  [RESC1005X40]  56.97,22.73 0 bottom
R60  10R  [RESC1005X40]  54.48,24 0 top
R61  10k  [RESC1005X40]  57.99,32.56 90 top
R62  10k  [RESC1005X40]  56.39,19.61 270 bottom
R63  10k  [RESC1005X40]  56.74,32.54 90 top
R64  33R  [RESC1005X40]  54.48,21.41 0 top
R65  33R  [RESC1005X40]  54.48,20.12 0 top
R66  10k  [RESC1005X40]  55.5,32.54 90 top
R67  4.7k  [RESC1608X60]  31.8,45.39 90 top
R68  10R  [RESC1005X40]  60.07,18.9 270 bottom
R69  33R  [RESC1005X40]  54.48,29.03 0 top
R70  10R  [RESC1005X40]  54.48,25.22 0 top
R71  0R  [RESC1608X60]  19.1,4.17 270 top
R72  10k  [RESC1005X40]  58.55,27.15 90 top
R73  10k  [RESC1005X40]  57.18,27.08 90 top
R74  0R  [RESC1608X60]  20.85,4.17 270 top
R75  10k  [RESC1005X40]  78.03,26.97 0 bottom
R76  33R  [RESC1005X40]  61.42,29.16 270 top
R77  [RESC1005X40]  29.41,45.42 90 top
R78  4.7k  [RESC1608X60]  22.91,47.27 0 top
R79  10k  [RESC1005X40]  26.47,4.42 0 top
R80  10k  [RESC1005X40]  26.47,5.71 0 top
R81  10k  [RESC1005X40]  26.52,3.12 0 top
R82  10k  [RESC1005X40]  26.52,1.83 0 top
R83  10k  [RESC1005X40]  48.95,12.32 90 top
R84  10k  [RESC1005X40]  50.27,12.32 90 top
R85  10k  [RESC1005X40]  51.61,12.32 90 top
R86  33R  [RESC1005X40]  13.82,8.15 90 bottom
R87  0R  [RESC1005X40]  12.55,8.1 90 bottom
R88  33R  [RESC1005X40]  47.32,46.43 270 top
R89  49.9R  [RESC1005X40]  36.88,38.94 270 bottom
S1  [TACTILE_SWITCH_SMD_4.6X2.8MM]  63.24,47.17 0 top
S4  [TACTILE_SWITCH_SMD_4.6X2.8MM]  69.29,47.14 180 top
U1  TDA19988BHN/C1,557  [QFN50P900X900X100-65N]  17.06,18.56 180 top
U2  TPS2051D  [D8_TEX]  61.37,9.09 90 top
U3  TPS65217ARSLR  [RSL48_4P05X4P05]  54.58,44.22 0 top
U4  LAN8710AI-EZK-TR  [QFN32_5X5MC_MCH]  59.85,23.22 270 top
U5  MT41K256M16HA-125:E  [FBGA96_9X14_MRN]  21.56,39.34 90 top
U6  3.3V  [SOT23-5]  12.65,4.09 0 top
U7  DSC1003CI2-050.0000  [CDFN4_3P2X2P5_MCH]  59.08,29.84 0 top
U8  SN74LVC1G07DRLR  [DRL5]  54.43,35.15 270 top
U9  DSC1003CI2-050.0000  [CDFN4_3P2X2P5_MCH]  9.42,8.69 180 bottom
U10  SN74LVC1G07DRLR  [DRL5]  18.53,47.45 0 top
U$1  AM335_EX  [AM3354_SMALL_PADS]  38.02,21.46 0 top
U$2  MICROSD  [MICROSD]  33.53,15.94 0 top
U$3  30POS  [30-POS]  43.02,43.21 90 top
U$4  FBCHIP-0603(1608-METRIC)  [BEADC1608X95N]  57.12,37.03 180 top
X1  [GHI-CONNECTORS_10118192-0001LF(MICRO-USB-B-AMPHENOL-FCI)]  54.18,1.44 0 top
Y1  ASDMB-24.576MHZ-LC-T  [ASDMB]  47.12,39.67 0 top
Y2  32.768kHz  [CRYSTAL-SMD-3.2X1.5MM]  41.19,39.62 180 top

## Library data of the parts
C1-C28 C30-C36 C39-C112 = Capacitor; CATEGORY: Capacitor
F1 LED1 LED2 Q2 U$2 = adafruit
H1-H4 = holes
IC1 = memory-micron; OC_FARNELL: unknown; OC_NEWARK: unknown
J1 = SparkFun-Connectors; PROD_ID: CONN-09556; SF_ID: PRT-08534
J2 = SparkFun-Connectors; PROD_ID: CONN-09520; SF_ID: PRT-09011
J4 = SparkFun-Connectors; PROD_ID: CONN-09696
J7 = SparkFun-Connectors; PROD_ID: CONN-08399
J10 = HDMI_HORIZ; ARROW_ELECTRONICS-PURCHASE-URL: https://snapeda.com/shop?store=Arrow+Electronics&id=1592408; DESCRIPTION: HDMI HDMI 1.4 Receptacle Connector 19 Position Surface Mount, Right Angle; Through Hole; DIGI-KEY_PART_NUMBER: 609-1010-1-ND; DIGIKEY-PURCHASE-URL: https://snapeda.com/shop?store=DigiKey&id=1592408; MF: Amphenol ICC; MOUSER-PURCHASE-URL: https://snapeda.com/shop?store=Mouser&id=1592408; MP: 10029449-001RLF; PACKAGE: None
L1-L4 = Inductor; CATEGORY: Inductor; SUB-CATEGORY: Fixed
R1-R89 = Resistor; CATEGORY: Resistor; SUB-CATEGORY: Fixed
S1 S4 = SparkFun-Switches; PROD_ID: SWCH-13065
U1 = TDA19988BHN_C1_557; ARROW_ELECTRONICS-PURCHASE-URL: https://snapeda.com/shop?store=Arrow+Electronics&id=526020; DESCRIPTION: Video Transmitter IC I²S HDMI 1.4a, ITU656 64-HVQFN (9x9) Package; DIGI-KEY_PART_NUMBER: 568-12059-ND; DIGIKEY-PURCHASE-URL: https://snapeda.com/shop?store=DigiKey&id=526020; MF: NXP USA; MOUSER-PURCHASE-URL: https://snapeda.com/shop?store=Mouser&id=526020; MP: TDA19988BHN/C1,557; PACKAGE: HVQFN-64 NXP Semiconductors
U2 = USB_POWER; BUILT_BY: EMA_UL_Team; MANUFACTURER: Texas Instruments; MANUFACTURER_PART_NUMBER: TPS2051D; SOURCELIBRARY: TI_2015-1-6; VENDOR: Texas Instruments
U3 = TI PMIC; MANUFACTURER_PART_NUMBER: TPS65217ARSLR; VENDOR: TEXAS INSTRUMENTS
U4 = LAN8710A; BUILT_BY: EMA_Jessica; COPYRIGHT: Copyright (C) 2018 Accelerated Designs. All rights reserved; MANUFACTURER_PART_NUMBER: LAN8710AI-EZK-TR; SOURCELIBRARY: Microchip_2019-08-23_2; VENDOR: Microchip
U5 = Memory; BUILT_BY: EMA_Jessica; COPYRIGHT: Copyright (C) 2016 Accelerated Designs. All rights reserved; MANUFACTURER_PART_NUMBER: MT41K256M16HA-125:E; SOURCELIBRARY: Micron_2018-04-06; VENDOR: Micron
U6 = SparkFun-IC-Power; PROD_ID: VREG-12457
U7 U9 = Oscillators; BUILT_BY: EMA_Jessica; COPYRIGHT: Copyright (C) 2018 Accelerated Designs. All rights reserved; MANUFACTURER_PART_NUMBER: DSC1003CI2-050.0000; SOURCELIBRARY: Microchip_2019-08-23_23; VENDOR: Microchip
U8 U10 = Buffer; DATASHEET_URL: http://www.ti.com/lit/gpn/SN74LVC1G07; DESCRIPTION: Single Buffer/Driver With Open-Drain Output; FAMILY_NAME: LL BUFFER AND DRIVER WITH OPEN-DRAIN OUTPUT; GENERIC_PART_NUMBER: SN74LVC1G07; INDUSTRY_STD_PKG_TYPE: SOT; MANUFACTURER: Texas Instruments; MANUFACTURER_PART_NUMBER: SN74LVC1G07DRLR; PACKAGE_DESIGNATOR: DRL; PIN_COUNT: 5; VENDOR: Texas Instruments
U$1 = TI AM335x
U$3 = AMP 2291283-2 BOARD CONNECTOR
U$4 = Filter; CATEGORY: Filter; SUB-CATEGORY: Ferrite bead
X1 = BeagleBone_Black_Wireless
Y1 = custom_crystals; BUILT_BY: EMA_UL_Team; MANUFACTURER_PART_NUMBER: ASDMB-24.576MHZ-LC-T; SOURCELIBRARY: Abracon_2012_11_16_ASDMB_Series; VENDOR: Abracon
Y2 = SparkFun-Clocks; PROD_ID: XTAL-13062

## Nets
5V0: C53.2 C55.1 C56.1 C57.1 C84.1 C86.2 C98.1 F1.2 L4.2 R7.2 U2.2 U2.3 U3.2 U3.7 U3.8 U3.21 U3.22 U3.32 U3.39 U3.42 U6.1 U8.5
50MHZ: R69.2 R76.1 U7.3
A14: U5.T7 U$1.H4
AIN3: U$1.A7 U$3.P$29
AIN6: U$1.A8 U$3.P$28
AUX_1V8: C43.1 C49.2 C50.2 C51.2 C52.2 C58.2 R57.2 U3.40 U$1.B9 U$1.D8 U$1.D10 U$1.E7 U$1.E9 U$1.H15 U$1.N16 U$1.R10 U$1.R11 U$1.R16
AUX_3V3: C33.1 C34.1 C35.1 C36.1 C39.1 C40.1 C41.1 C42.1 C54.2 LED1.A LED2.A R1.2 R2.2 R25.2 R26.2 R27.2 R28.2 R29.2 R30.2 R38.2 R39.2 R40.2 R52.2 R54.2 R71.2 R79.2 R80.2 R81.2 R82.2 R83.2 R84.2 R85.2 R87.2 U3.43 U6.3 U10.5 U$1.E10 U$1.E11 U$1.E12 U$1.E13 U$1.F14 U$1.G14 U$1.H14 U$1.J14 U$1.K14 U$1.L14 U$1.N5 U$1.N15 U$1.P5 U$1.P6 U$1.P7 U$1.P8 U$1.P10 U$1.P11 U$1.P12 U$1.P13 U$1.R15 U$2.4
DDQ_CS: U5.L2 U$1.H2
DDR_A0: U5.N3 U$1.F3
DDR_A1: U5.P7 U$1.H1
DDR_A2: U5.P3 U$1.E4
DDR_A3: U5.N2 U$1.C3
DDR_A4: U5.P8 U$1.C2
DDR_A5: U5.P2 U$1.B1
DDR_A6: U5.R8 U$1.D5
DDR_A7: U5.R2 U$1.E2
DDR_A8: U5.T8 U$1.D4
DDR_A9: U5.R3 U$1.C1
DDR_A10: U5.L7 U$1.F4
DDR_A11: U5.R7 U$1.F2
DDR_A12: U5.N7 U$1.E3
DDR_A13: U5.T3 U$1.H3
DDR_BA0: U5.M2 U$1.C4
DDR_BA1: U5.N8 U$1.E1
DDR_BA2: U5.M3 U$1.B3
DDR_CASN: U5.K3 U$1.F1
DDR_CK_N: U5.K7 U$1.D1
DDR_CK_P: U5.J7 U$1.D2
DDR_CKE: R33.2 U5.K9 U$1.G3
DDR_D0: U5.E3 U$1.M3
DDR_D1: U5.F7 U$1.M4
DDR_D2: U5.F2 U$1.N1
DDR_D3: U5.F8 U$1.N2
DDR_D4: U5.H3 U$1.N3
DDR_D5: U5.H8 U$1.N4
DDR_D6: U5.G2 U$1.P3
DDR_D7: U5.H7 U$1.P4
DDR_D8: U5.D7 U$1.J1
DDR_D9: U5.C3 U$1.K1
DDR_D10: U5.C8 U$1.K2
DDR_D11: U5.C2 U$1.K3
DDR_D12: U5.A7 U$1.K4
DDR_D13: U5.A2 U$1.L3
DDR_D14: U5.B8 U$1.L4
DDR_D15: U5.A3 U$1.M1
DDR_DQM0: U5.E7 U$1.M2
DDR_DQM1: U5.D3 U$1.J2
DDR_DQS0_N: U5.G3 U$1.P2
DDR_DQS0_P: U5.F3 U$1.P1
DDR_DQS1_N: U5.B7 U$1.L2
DDR_DQS1_P: U5.C7 U$1.L1
DDR_ODT: U5.K1 U$1.G1
DDR_RASN: U5.J3 U$1.G4
DDR_RESETN: R77.1 U5.T2 U$1.G2
DDR_VREF: C103.1 C104.1 R31.2 R32.2 U5.H1 U5.M8 U$1.J4
DDR_VTP: R89.2 U$1.J3
DDR_WEN: U5.L3 U$1.B2
EMU0: U$1.C14 U$3.P$23
EMU1: U$1.B14 U$3.P$24
EXT_WAKEUP: R4.1 U3.13 U$1.C5
EXTINTN: R38.1 U3.45 U$1.B18
FILT_3V3: C108.1 C109.1 R41.2 R42.2 R43.2 R44.2 U4.1 U4.27 U$4.1
FUSE_5V0: F1.1 J10.18 R49.2 R50.2
G1: Q2.4
G2: Q2.2
GND: C1.2 C2.2 C3.2 C4.2 C5.2 C6.2 C7.2 C8.2 C9.2 C10.2 C11.2 C12.2 C13.2 C14.2 C15.2 C16.2 C17.2 C18.2 C19.2 C20.2 C21.2 C22.2 C23.2 C24.2 C25.2 C26.2 C27.2 C28.2 C30.1 C31.1 C32.1 C33.2 C34.2 C35.2 C36.2 C39.2 C40.2 C41.2 C42.2 C43.2 C44.2 C45.2 C46.2 C47.2 C48.2 C49.1 C50.1 C51.1 C52.1 C53.1 C54.1 C55.2 C56.2 C57.2 C58.1 C59.1 C60.2 C61.2 C62.2 C63.2 C64.2 C65.2 C66.2 C67.2 C68.2 C69.2 C70.2 C71.2 C72.2 C73.2 C74.2 C75.2 C76.2 C77.2 C78.2 C79.2 C80.2 C81.2 C82.2 C83.2 C84.2 C85.1 C86.1 C87.2 C88.2 C89.2 C90.2 C91.2 C92.2 C93.2 C94.2 C95.2 C96.2 C97.1 C98.2 C99.2 C100.2 C101.2 C102.2 C103.2 C104.2 C105.2 C106.2 C107.2 C108.2 C109.2 C110.2 C111.2 C112.2 IC1.13 IC1.36 IC1.38 J1.M1 J1.M2 J2.GND J2.SHLD1 J2.SHLD2 J4.1 J7.2 J10.2 J10.5 J10.8 J10.11 J10.17 J10.S1 J10.S2 J10.S3 J10.S4 R3.1 R9.1 R10.1 R11.1 R12.1 R13.1 R14.1 R15.1 R16.1 R17.1 R18.1 R19.1 R20.1 R21.1 R22.1 R23.1 R24.1 R31.1 R33.1 R34.1 R37.1 R46.1 R47.1 R48.1 R51.2 R53.1 R55.2 R67.1 R75.1 R88.2 R89.1 S1.1 S1.2 S4.1 S4.2 U1.8 U1.9 U1.16 U1.17 U1.18 U1.19 U1.53 U1.54 U1.61 U1.62 U1.63 U1.65 U2.1 U3.30 U3.41 U3.49 U4.24 U4.25 U4.33 U5.A9 U5.B1 U5.B3 U5.B9 U5.D1 U5.D8 U5.E1 U5.E2 U5.E8 U5.F9 U5.G1 U5.G8 U5.G9 U5.J2 U5.J8 U5.M1 U5.M9 U5.P1 U5.P9 U5.T1 U5.T9 U6.2 U7.2 U8.3 U9.2 U10.3 U$1.A1 U$1.A5 U$1.A9 U$1.A18 U$1.E8 U$1.F8 U$1.G8 U$1.G9 U$1.G11 U$1.G12 U$1.H6 U$1.H7 U$1.H8 U$1.H9 U$1.H10 U$1.H12 U$1.J6 U$1.J7 U$1.J8 U$1.J9 U$1.J10 U$1.J11 U$1.K7 U$1.K9 U$1.K10 U$1.K11 U$1.L10 U$1.L11 U$1.L12 U$1.L13 U$1.M6 U$1.M7 U$1.M8 U$1.M9 U$1.M10 U$1.M12 U$1.M14 U$1.N7 U$1.N10 U$1.N11 U$1.N14 U$1.V1 U$1.V11 U$1.V18 U$2.6 U$2.MT1 U$2.MT2 U$3.P$14 U$3.P$15 U$3.P$26 U$3.P$27 X1.CGND1 X1.CGND2 X1.CGND3 X1.CGND4 X1.CGND5 X1.CGND6 X1.GND Y1.2
GPIO0: U$1.D17 U$3.P$1
GPIO1: U$1.D18 U$3.P$2
GPIO2: U$1.A15 U$3.P$3
GPIO3: U$1.A16 U$3.P$4
GPIO4: U$1.A17 U$3.P$5
GPIO5: U$1.B16 U$3.P$6
GPIO6: U$1.B17 U$3.P$7
GPIO7: U10.2 U$1.C18 U$3.P$8
GPIO8: U$1.E17 U$3.P$9
GPIO9: U$1.E18 U$3.P$10
GPIO10: U$1.J18 U$3.P$11
GPIO11: U$1.V16 U$3.P$12
GPIO12: U$1.V17 U$3.P$13
GPIO_3V3: C105.1 R71.1 R74.1 U6.5 U$3.P$30
GPMC_WEN: IC1.18 U$1.U6
GPMC_WPN: IC1.19 U$1.U17
HDMI_1V8: C87.1 C88.1 C89.1 C90.1 C91.1 C92.1 C93.1 C94.1 C95.1 C96.1 R57.1 U1.5 U1.14 U1.29 U1.35 U1.36 U1.41 U1.46 U1.47 U1.48 U1.55
HDMI_CEC: J10.13 U1.30
HDMI_HPD: J10.19 U1.31
HDMI_INT: R56.1 U1.50 U$1.U16
HDMI_SCL: J10.15 R49.1 U1.33
HDMI_SDA: J10.16 R50.1 U1.32
HDMI_TEST: R48.2 U1.49
HDMI_TX0+: J10.7 U1.40
HDMI_TX0-: J10.9 U1.39
HDMI_TX1+: J10.4 U1.43
HDMI_TX1-: J10.6 U1.42
HDMI_TX2+: J10.1 U1.45
HDMI_TX2-: J10.3 U1.44
HDMI_TXC+: J10.10 U1.38
HDMI_TXC-: J10.12 U1.37
I2C0_SCL: R1.1 U1.52 U3.28 U$1.C16
I2C0_SDA: R2.1 U1.51 U3.27 U$1.C17
LCD_DATA0: C79.1 R24.2 R25.1 U1.15 U$1.R1
LCD_DATA1: C78.1 R23.2 R26.1 U1.13 U$1.R2
LCD_DATA2: C77.1 R22.2 R27.1 U1.12 U$1.R3
LCD_DATA3: C76.1 R21.2 R28.1 U1.11 U$1.R4
LCD_DATA4: C75.1 R20.2 R29.1 U1.10 U$1.T1
LCD_DATA5: C74.1 R19.2 R30.1 U1.7 U$1.T2
LCD_DATA6: C73.1 R18.2 U1.6 U$1.T3
LCD_DATA7: C72.1 R17.2 U1.3 U$1.T4
LCD_DATA8: C71.1 R16.2 U1.2 U$1.U1
LCD_DATA9: C70.1 R15.2 U1.1 U$1.U2
LCD_DATA10: C69.1 R14.2 U1.64 U$1.U3
LCD_DATA11: C68.1 R13.2 U1.60 U$1.U4
LCD_DATA12: C67.1 R12.2 U1.59 U$1.V2
LCD_DATA13: C66.1 R11.2 U1.58 U$1.V3
LCD_DATA14: C65.1 R10.2 R39.1 U1.57 U$1.V4
LCD_DATA15: C64.1 R9.2 R40.1 U1.56 U$1.T5
LCD_DE: U1.20 U$1.R6
LCD_HSYNC: U1.22 U$1.R5
LCD_PCLK: U1.4 U$1.V5
LCD_VSYNC: U1.21 U$1.U5
MCASP_CLK: U$1.A14 Y1.3
MDIO_CLK: U4.17 U$1.M18
MIDO_DATA: R58.2 U4.16 U$1.M17
MII1_CRS_DV: R60.1 U$1.H17
MII1_REFCLK: R69.1 U$1.H18
MII1_RXD0: R35.2 R66.1 U4.11
MII1_RXD1: R36.2 R63.1 U4.10
MII1_RXERR: R70.1 U$1.J15
MII1_TX_EN: R68.2 U$1.J16
MII1_TXD0: R64.2 U4.22
MII1_TXD1: R65.2 U4.23
MMC0_CD: R85.1 U$1.C15 U$2.CD1 U$2.CD2
MMC0_CLK: R5.1 R83.1 U$2.5
MMC0_CMD: R84.1 U$1.G18 U$2.3
MMC0_DAT0: R79.1 U$1.G16 U$2.7
MMC0_DAT1: R80.1 U$1.G15 U$2.8
MMC0_DAT2: R81.1 U$1.F18 U$2.1
MMC0_DAT3: R82.1 U$1.F17 U$2.2
MODE2N: R60.2 R62.1 U4.15
N$1: C107.1 J7.1 U3.10
N$2: C61.1 J1.3 J1.6 R45.2
N$3: R47.2 U4.18
N$4: J1.11 U4.3
N$5: C80.1 U$1.C10
N$6: C81.1 U$1.D6
N$7: R46.2 U4.32
N$8: C45.1 U3.48
N$9: C62.1 C63.1 U4.6
N$10: J1.9 R75.2 U4.2
N$11: R53.2 U$1.B4
N$12: U3.4 U3.5 U3.6
N$13: R35.1 U$1.M16
N$14: C44.1 U3.47
N$15: R5.2 U$1.G17
N$16: C46.1 Q2.3 R6.1
N$17: R36.1 U$1.L15
N$18: LED2.C R78.2
N$19: R86.1 U9.3
N$20: R34.2 U5.L8
N$21: C82.1 U$1.D11
N$22: LED1.C R67.2
N$23: S1.3 S1.4 U3.25
N$24: C60.1 U$1.A6 Y2.P$1
N$25: C47.1 U$1.A4 Y2.P$2
N$26: R64.1 U$1.K17
N$27: R76.2 U4.5
N$28: R78.1 U10.4
N$29: C83.1 U$1.D9
N$30: L4.1 U3.37
N$31: R65.1 U$1.K16
N$32: J1.12 R3.2
N$33: J1.10 R37.2
N$34: R87.1 U9.4
N$36: R86.2 U1.27
N$38: R68.1 U4.21
N$44: R51.1 U1.34
N$49: L1.1 U3.31
N$50: L2.1 U3.23
N$51: L3.1 U3.20
N$52: X1.ID
NAND_ALE: IC1.17 U$1.R7
NAND_CLE: IC1.16 U$1.T6
NAND_CS0: IC1.9 U$1.V6
NAND_CS1: IC1.10 U$1.U9
NAND_D0: IC1.29 U$1.U7
NAND_D1: IC1.30 U$1.V7
NAND_D2: IC1.31 U$1.R8
NAND_D3: IC1.32 U$1.T8
NAND_D4: IC1.41 U$1.U8
NAND_D5: IC1.42 U$1.V8
NAND_D6: IC1.43 U$1.R9
NAND_D7: IC1.44 U$1.T9
NAND_REN: IC1.8 U$1.T7
NAND_WAIT0: IC1.7 U$1.T17
NAND_WAIT1: IC1.6 U$1.V12
PHYAD0N: R59.1 R70.2 U4.13
PHYAD1N: R72.1 U4.7
PHYAD2N: R73.1 U4.8
PMIC_PWR_EN: U3.9 U$1.C6
PWRONRSTN: U3.26 U8.2 U$1.B15
RMIISELN: R61.1 U4.9
RTC_PWRONRSTN: U3.46 U$1.B5
RX_N: J1.2 R42.1 U4.30
RX_P: J1.1 R41.1 U4.31
SPI1_CLK: U1.23 U$1.A13
SPI1_CS0: U1.24 U$1.C12
SPI1_D0: U1.25 U$1.B13
SYS_3V3: C59.2 C100.1 C101.1 C102.1 C110.1 C111.1 C112.1 IC1.12 IC1.37 R45.1 R56.2 R58.1 R59.2 R61.2 R62.2 R63.2 R66.2 R72.2 R73.2 R74.2 U3.1 U4.12 U7.4 U$4.2 Y1.4
TCK: U$1.A12 U$3.P$17 U$3.P$22
TDI: U$1.B11 U$3.P$19
TDO: U$1.A11 U$3.P$20
TMS: U$1.C11 U$3.P$16
TRSTN: R88.1 U$1.B10 U$3.P$18
TVDD: U$3.P$21
TX_N: J1.8 R44.1 U4.28
TX_P: J1.7 R43.1 U4.29
UART0_RXD: J4.3 U$1.E15
UART0_TXD: J4.2 U$1.E16
USB0_N: J2.D- U$1.N18
USB0_OCN: R54.1 U2.5 U$1.T16
USB0_P: J2.D+ U$1.N17
USB0_PWR_EN: R55.1 U2.4 U$1.F16
USB0_VBUS: C99.1 C106.1 J2.VBUS U2.6 U2.7 U2.8 U$1.P15
USB1_N: U$1.R18 X1.D-
USB1_P: U$1.R17 X1.D+
V_BUS: C85.2 R7.1 U3.12 U$1.T18 X1.VBUS
VDD_CORE: C16.1 C17.1 C18.1 C19.1 C20.1 C21.1 C22.1 C23.1 C24.1 C25.1 C30.2 L2.2 U3.29 U$1.F6 U$1.F7 U$1.G6 U$1.G7 U$1.G10 U$1.H11 U$1.J12 U$1.K6 U$1.K8 U$1.K12 U$1.L6 U$1.L7 U$1.L8 U$1.L9 U$1.M11 U$1.M13 U$1.N8 U$1.N9 U$1.N12 U$1.N13
VDD_MPU: C12.1 C13.1 C14.1 C15.1 C31.2 L1.2 U3.24 U$1.F10 U$1.F11 U$1.F12 U$1.F13 U$1.G13 U$1.H13 U$1.J13
VDD_MPU_MON: U$1.A2 U$3.P$25
VDDS_1V8: C6.1 C9.1 C10.1 C11.1 C97.2 R4.2 U3.3 U3.18 U$1.D7 U$1.E6 U$1.E14 U$1.F9 U$1.K13 U$1.N6 U$1.P9 U$1.P14
VDDS_DDR: C1.1 C2.1 C3.1 C4.1 C5.1 C7.1 C8.1 C26.1 C27.1 C28.1 C32.2 L3.2 R32.1 R77.2 U3.19 U5.A1 U5.A8 U5.B2 U5.C1 U5.C9 U5.D2 U5.D9 U5.E9 U5.F1 U5.G7 U5.H2 U5.H9 U5.K2 U5.K8 U5.N1 U5.N9 U5.R1 U5.R9 U$1.E5 U$1.F5 U$1.G5 U$1.H5 U$1.J5 U$1.K5 U$1.L5
VPP: U$1.M5
WARMRSTN: R52.1 S4.3 S4.4 U4.19 U8.4 U$1.A10
XTALIN: C48.1 Q2.1 R8.1 U$1.V10
XTALOUT: R6.2 R8.2 U$1.U11

## Tracks (layer width: path | path; a pad name or v marks a point on that pad's centre or on a via)
5V0  (via drill 0.25)
  Top 0.127: U3.32 57.69,44.96 58.05,44.96 59.01,45.91 v59.13,45.91
  Top 0.152: C98.1 55.91,12.23 | v61.32,8.08 61.2,8.08 | U3.2 50.77,46.02 50.62,45.87 v50.56,45.87 50.56,45.83 50.16,45.44 50.16,45.06 50.47,44.76 50.47,44.22 50.34,44.09 49.02,44.09 48.69,44.42 v48.69,45.83 | v56.46,48.51 55.98,48.03 U3.39 | v54.41,34.09 54.83,34.51 U8.5
  Top 0.254: U2.2 60.73,7.49 v61.32,8.08 62,7.39 U2.3 62,4.93 R7.2 | U3.2 51.65,45.98 52.12,45.98 | U3.32 57.49,44.89 57.04,44.89 56.91,45.03 56.91,46.27 56.64,46.54 56.19,46.54 55.98,46.75 U3.39 55.96,47.18 55.96,46.73 55.74,46.51 55.02,46.51 54.78,46.75 U3.42 54.74,47.15 54.74,46.7 54.58,46.54 52.53,46.54 52.33,46.34 52.33,46.19 52.12,45.98 | F1.2 2.26,32.77 v2.69,33.2 | C98.1 55.69,11.8 v55.27,11.38 | v55.93,39.95 55.93,41.19 U3.22 U3.21 55.54,41.29 55.54,41.74 55.38,41.9 52.53,41.9 52.33,42.1 52.33,43.35 52.13,43.55 51.68,43.55 U3.8 U3.7 52.06,44.02 52.33,44.3 52.33,45.77 52.12,45.98 | v10.95,4.04 10.95,3.12 11.28,2.79 U6.1 11.7,1.31 12.22,0.79 16.76,0.79 17.35,1.37 C84.1
  Route15 0.127: v56.74,38.3 55.91,38.3 55.86,38.26 55.86,35.85 54.41,34.4 v54.41,34.09
  Route15 0.254: v2.69,33.2 8.38,38.89 8.38,42.48 12.34,46.44 30.44,46.44 32.26,44.63 33.82,44.63 35.08,45.88 39.21,45.88 39.76,46.43 43.65,46.43 44.25,45.83 v48.69,45.83
  Bottom 0.127: C56.1 56.17,38.87 v56.74,38.3
  Bottom 0.152: v50.56,45.87 50.55,45.87 | 50.55,45.87 49.85,45.87 49.51,45.53 49.51,43.84 49.86,43.48 C86.2 | C53.2 50.55,47.12 50.55,45.87 | L4.2 56.7,48.51 v56.46,48.51
  Bottom 0.254: C57.1 61.37,46.46 60.86,45.95 59.16,45.95 v59.13,45.91 | C55.1 53.62,38.87 C56.1 | C56.1 55.68,39.7 v55.93,39.95 | C56.1 58.61,38.87 59.41,39.67 62.38,39.67 63.12,40.41 65.51,40.41 68.78,37.13 73.81,37.13 77.27,33.68 v78.33,33.68 | v2.69,33.2 1.14,31.65 1.14,10.31 3.2,8.26 6.08,8.26 10.3,4.04 v10.95,4.04
  pour Route15: 50.29,5.41 50.29,0.28 77.6,0.28 80.85,3.53 80.85,44.15 80.59,44.4 80.59,46.18 77.72,49.05 75.34,49.05 73.38,47.09 73.38,44.73 75.16,42.95 77.9,42.95 77.9,24.77 77.88,24.77 76.17,23.06 70.59,23.06 70.51,22.99 70.48,22.99 66.5,19 60.05,19 56.9,15.85 56.9,14.71 54.99,12.8 50.34,12.8 49.86,12.32 49.86,5.84
  pour Top: 57.79,44.75 58.7,44.75 60.27,46.33 60.5,46.33 60.5,47.8 60.05,47.8 58.39,46.15 58.39,45.37
50MHZ  (via drill 0.25)
  Top 0.127: R69.2 55.5,28.52 v56.08,28.52 | U7.3 60.03,27.24 v59.94,27.15
  Top 0.152: U7.3 60.9,29.67 R76.1
  Bottom 0.127: v56.08,28.52 58.57,28.52 v59.94,27.15
A14  (via drill 0.25)
  Top 0.125: U$1.H4 40.84,29.88 v40.84,29.9 | v28.42,40.41 28.1,40.41 U5.T7
  Bottom 0.125: v40.84,29.9 v40.84,29.91 40.45,30.3 40.45,31.22 40.84,31.61 40.84,32.09 40.95,32.19 41.94,32.19 42.52,32.77 42.52,33.5 42.08,33.93 41.76,33.93 40.39,35.31 38.71,35.31 38.16,35.86 38.16,36.41 37.43,37.13 32.91,37.13
  Bottom 0.127: v28.42,40.41 30.23,40.41 30.34,40.3 arc-90 30.34,40.03 30.31,40 arc90 30.31,39.73 30.36,39.69 arc90 30.63,39.69 30.95,40.01 arc-90 31.22,40.01 31.27,39.96 arc-90 31.27,39.69 30.95,39.37 arc90 30.95,39.1 31,39.05 arc90 31.27,39.05 31.59,39.37 arc-90 31.86,39.37 31.91,39.32 arc-90 31.91,39.05 31.59,38.73 arc90 31.59,38.46 31.64,38.41 arc90 31.91,38.41 32.23,38.73 arc-90 32.5,38.73 32.55,38.68 arc-90 32.55,38.41 32.23,38.09 arc90 32.23,37.82 32.27,37.77 arc90 32.54,37.77 32.87,38.09 arc-90 33.13,38.09 33.19,38.04 arc-90 33.19,37.77 32.86,37.45 arc90 32.86,37.18 32.91,37.13
AIN3  (via drill 0.25)
  Top 0.127: U$1.A7 42.82,36.92 v42.6,37.15 | U$3.P$29 36.52,45.6 v36.05,45.14
  Bottom 0.127: v42.6,37.15 42.43,37.31 41.56,37.31 40.13,38.74 40.13,40.82 36.93,44.02 36.93,44.26 v36.05,45.14
AIN6  (via drill 0.25)
  Top 0.127: U$1.A8 43.62,37.71 v43.2,38.12 | U$3.P$28 37.02,45.49 v36.66,45.14
  Bottom 0.127: v43.2,38.12 42.62,37.54 41.66,37.54 40.36,38.84 40.36,41.02 41,41.66 41,42.29 40.56,42.72 38.71,42.72 37.16,44.27 37.16,44.64 v36.66,45.14
AUX_1V8  (via drill 0.25)
  Top 0.127: U$1.E9 U$1.D10 44.84,33.04 v44.84,33.09 | U$1.H15 49.58,29.11 49.58,29.06 v49.59,29.04 | U$1.R16 49.66,23.5 v49.66,23.47 | U$1.N16 v50.42,25.07
  Top 0.152: U$1.E7 43.2,32.24 v43.2,32.26 43.2,32.28 | v44.8,33.88 U$1.B9 | U$1.R10 45.62,23.47 v45.64,23.47 U$1.R11 | U3.40 55.61,47.22 | v55.58,48.51 55.6,48.54 55.61,48.54
  Top 0.2: R57.2 14.17,27.15 v14.17,27.28
  Top 0.254: U$1.D8 43.24,32.28 43.2,32.28 | 55.61,47.22 55.61,48.54
  Route15 0.127: 40.69,21.26 40.72,21.29 40.72,22.05 40.46,22.3 40.39,22.3 40.39,23.77 | 41.99,26.31 41.99,27 42.27,27.28 | 42.06,31.14 42.06,31.88
  Route15 0.152: 49.65,29.04 v49.59,29.04
  Route15 0.254: 44.77,33.84 v44.8,33.88 | 49.65,29.04 51.08,27.61 51.08,26.59 50.42,25.93 v50.42,25.07 50.42,24.23 v49.66,23.47 49.2,23.01 46.1,23.01 v45.64,23.47 45.64,22.66 44.25,21.26 40.69,21.26 40.58,21.26 40.46,21.39 35.26,21.39 34.75,21.89 22.17,21.89 16.79,27.28 v14.17,27.28 | 40.39,23.77 40.39,23.85 40.84,24.31 40.84,25.07 41.99,26.21 41.99,26.31 | 42.27,27.28 42.88,27.89 42.88,29.39 42.06,30.2 42.06,31.14 | 42.06,31.88 42.37,32.18 42.65,32.18 | v55.58,48.51 55.2,48.89 52.4,48.89 48.26,44.75 48.26,41.24 42.7,35.67 42.7,35.05
  Bottom 0.127: v44.84,33.09 43.98,32.23 C49.2 | C43.1 49.96,23.19 49.68,23.47 v49.66,23.47 | C52.2 45.8,21.21 45.26,21.76 45.26,22.07 45.64,22.45 v45.64,23.47
  Bottom 0.152: v44.8,33.88 44.8,37.34 C50.2 C51.2 | v55.58,48.51 56.13,47.95 C58.2
  pour Route15: 43.61,31.98 42.8,32.79 42.8,33.4 42.95,33.55 43.31,33.55 44.09,32.77 44.91,32.77 45.72,33.58 45.72,35.13 45.39,35.46 42.49,35.46 42.49,31.83 43.49,31.83
AUX_3V3  (via drill 0.25)
  Top 0.127: U$1.E11 45.62,32.26 | U$1.E13 47.23,32.26 47.22,32.26 | 41.59,25.09 U$1.N5 | U$1.P6 42.43,24.26 | 42.43,24.26 42.44,24.26 42.45,24.27 v42.48,24.27 | U$1.P8 43.64,24.66 44.04,24.26 44.77,24.26 v44.79,24.24 | U$1.P10 45.24,24.66 v45.64,24.26 | U$1.P5 41.22,24.73 41.59,25.09 | U$1.P7 42.43,24.26 | U$1.P11 46.02,24.64 v45.64,24.26 | U$1.P13 U$1.P12 47.22,24.27 v47.22,24.24 | 45.64,24.24 v45.64,24.26 | 41.59,25.09 41.59,25.06 v41.55,25.02 | R25.2 28.2,22.5 27.67,23.04 24.29,23.04 24.22,22.98 v24.21,22.98 | R27.2 29.11,20.37 v29.16,20.42 | R28.2 29.13,19.33 v29.16,19.36 | R29.2 29.06,18.24 v29.11,18.29 | R30.2 29.01,17.12 v29.11,17.22 | U$1.R15 48.84,23.48 v48.84,23.47 | R40.2 28.46,10.34 27.97,10.82 24.16,10.82 v23.7,10.36 | R39.2 28.25,12.22 v28.25,12.34 | U$1.N15 v48.83,25.86 v48.82,25.86 | R54.2 65.82,10 v66.12,10 | 39.98,3.35 v39.98,3.29 | R26.2 28.84,21.44 v29.11,21.17 | R83.2 R84.2 R85.2
  Top 0.152: U$1.E10 45.62,32.26 v45.64,32.26 | U$1.E12 47.22,32.26 v47.24,32.26 | U$1.F14 U$1.G14 48.79,29.9 v48.84,29.9 | U$1.L14 48.45,27.06 v48.84,27.46 v48.83,27.46 U$1.K14 | U$1.H14 v48.84,29.88 v48.84,29.9 | v48.84,29.9 v48.84,29.89 | U$1.J14 v48.84,28.24 v48.85,28.24 | R83.2 48.44,12.83 47.98,12.37 43.31,12.37 43.03,12.65 v43.03,13.99 | R80.2 v27.64,5.71 | R79.2 27.64,4.42 v27.66,4.45 | R81.2 27.64,3.12 v27.66,3.15 | R82.2 v27.74,1.83 | U10.5 19.19,47.93 22.57,47.93 23.15,47.35 23.15,46.71 23.25,46.6 25.62,46.6 26.3,47.29 LED2.A 28.68,47.29 LED1.A 29.16,47.32 30.85,45.63 32.36,45.63 32.47,45.73 32.47,45.8 v32.77,46.1 | R52.2 72.57,44.27 72.07,43.77 71.24,43.77 69.55,45.47 v69.52,45.47
  Top 0.25: v53.85,48.3 53.85,48.18 54.38,47.64 U3.43
  Top 0.254: U$2.4 39.23,4.11 39.98,3.35 | v53.85,48.3 53.06,49.09 44.97,49.09 v44.87,48.98 | R71.2 19.22,3.47 | 19.22,3.47 v19.81,4.06 | U6.3 13.6,1.61 14.05,1.17 16.48,1.17 16.87,1.55 16.87,2.16 16.43,2.59 16.43,3.83 16.71,4.12 18.67,4.12 19.22,3.57 19.22,3.47
  Route15 0.127: 45.09,19.89 45.41,19.89
  Route15 0.152: v53.85,48.3 54.5,47.65 62.84,47.65 66.06,44.42 | 65.71,44.42 66.06,44.42 | 66.06,44.42 68.48,44.42 v69.52,45.47 | v27.64,5.71 27.66,5.69 v27.66,4.45 v27.66,3.15 27.74,3.07 v27.74,1.83
  Route15 0.25: 48.84,30.66 48.84,32.37 49.33,32.85 | 53.28,47.73 v53.85,48.3
  Route15 0.254: v45.64,32.26 v47.24,32.26 48.84,30.66 v48.84,29.89 48.23,29.29 48.23,28.8 48.79,28.24 v48.85,28.24 48.85,28.16 48.84,28.15 v48.84,27.46 49.3,27 49.3,26.31 47.65,24.66 | 49.33,32.85 49.33,33.45 48.64,34.14 48.64,37.32 48.62,37.34 48.62,44.59 51.78,47.75 51.98,47.75 52,47.73 53.28,47.73 | 65.71,44.42 64.62,44.42 62.2,42.01 62.2,38.94 61.01,37.74 57.71,37.74 57.38,37.41 57.38,34.38 52.46,29.46 52.29,29.46 52.02,29.2 52.02,25.85 52.69,25.18 52.69,22.56 53.24,22.02 53.24,21.36 52.63,20.75 46.43,20.75 45.57,19.89 45.41,19.89 41.45,19.89 40.31,21.03 38.66,21.03 38.63,21.01 34.8,21.01 34.63,21.17 v29.11,21.17 | v43.03,13.99 44.35,15.32 44.35,19.15 45.09,19.89
  Route15 0.381: 68.83,12.8 66.12,10.08 v66.12,10 | 68.83,12.8 75.77,12.8 79.12,16.15 79.12,42.47 78.11,43.48 71.5,43.48 v69.52,45.47 | v69.42,13.51 69.42,13.39 68.83,12.8
  Bottom 0.127: 43.06,23.64 C40.1 | v23.7,10.36 23.85,10.36 25.83,12.34 | 25.83,12.34 28.41,14.92 28.41,14.95 29.11,15.65 v29.11,17.22 | v48.82,25.86 48.19,25.22 C33.1 48.19,24.94 47.66,24.41 47.48,24.41 47.31,24.24 v47.22,24.24 | v48.84,23.47 48.92,23.47 49.48,22.91 49.48,22.05 48.64,21.21 C42.1 | v28.25,12.34 25.83,12.34 | v39.98,3.29 39.98,3.35 | v29.11,21.17 26.02,21.17 v24.21,22.98 | v32.77,46.1 33.6,46.94 44.37,46.94 44.63,47.19 44.63,48.74 v44.87,48.98
  Bottom 0.152: v42.48,24.27 42.48,24.09 42.77,23.79 42.81,23.79 C40.1 | C41.1 40.74,24.71 41.06,25.02 v41.55,25.02 | v47.24,32.26 47.98,32.26 C34.1 | v45.64,32.26 45.84,32.26 C36.1 | v27.64,5.71 26.54,5.71 23.7,8.56 v23.7,10.36 | C39.1 48.97,29.77 v48.84,29.89
  Bottom 0.254: C54.2 54.09,48.3 v53.85,48.3 53.9,48.25 53.9,46.99 53.67,46.76 R38.2 | C35.1 44.48,24.56 v44.79,24.24 | 39.98,3.35 43.03,6.4 v43.03,13.99 | v29.11,17.22 v29.11,18.29 29.16,18.34 v29.16,19.36 v29.16,20.42 29.16,21.12 v29.11,21.17 | v19.81,4.06 19.81,6.48 v23.7,10.36
  Bottom 0.381: R1.2 R2.2 69.62,13.72 v69.42,13.51
  pour Route15: 41.15,25.25 41.15,23.72 42.01,22.86 48.59,22.86 49.15,23.42 49.15,23.8 48.08,24.87 42.82,24.87 42.44,25.25
  pour Bottom: 0.41,9.63 22.15,9.63 28.6,16.08 28.6,21.18 28.88,21.46 29.44,21.46 29.72,21.18 29.72,19.51 33.12,16.1 47.04,16.1 47.55,15.6 47.55,1.12 46.76,0.33 1.5,0.33 0.43,1.4
DDQ_CS
  Top 0.125: U$1.H2 38.54,29.46 38.17,29.1 29.25,29.1 29.2,29.15 arc-90 29.2,29.42 29.23,29.45 arc90 29.23,29.72 29.16,29.8 arc90 28.89,29.8 28.56,29.46 arc-90 28.29,29.46 28.21,29.54 arc-90 28.21,29.81 28.55,30.14 arc90 28.55,30.41 28.47,30.48 arc90 28.2,30.48 27.87,30.15 arc-90 27.6,30.15 27.53,30.23 arc-90 27.53,30.49 27.86,30.83 arc90 27.86,31.09 27.79,31.17 arc90 27.52,31.17 27.18,30.84 arc-90 26.92,30.84 26.84,30.91 arc-90 26.84,31.18 27.17,31.51 arc90 27.17,31.78 27.1,31.86 arc90 26.83,31.86 26.5,31.52 arc-90 26.23,31.52 26.15,31.6 arc-90 26.15,31.87 26.49,32.2 arc90 26.49,32.47 26.41,32.54 arc90 26.14,32.54 25.81,32.21 arc-90 25.54,32.21 25.47,32.29 arc-90 25.47,32.55 25.8,32.89 arc90 25.8,33.16 25.72,33.23 arc90 25.46,33.23 25.12,32.9 arc-90 24.86,32.9 24.78,32.97 arc-90 24.78,33.24 25.11,33.57 arc90 25.11,33.84 25.04,33.92 arc90 24.77,33.92 24.74,33.89 arc-90 23.81,33.89 22.37,35.32 22.37,36.31 22.6,36.54 23.16,36.54 U5.L2
DDR_A0  (via drill 0.25)
  Top 0.125: v25.6,37.36 25.55,37.36 U5.N3 | U$1.F3 39.57,31.06 v39.2,31.43
  Bottom 0.125: 37.22,36.66 37.7,36.18 37.7,35.55 38.56,34.7 40.23,34.7 41.47,33.46 41.83,33.46 42.05,33.25 42.05,33.19 42.06,33.17 42.05,33.16 42.05,32.94 41.75,32.65 40.7,32.65 40.37,32.32 40.37,32.11 39.7,31.43 v39.2,31.43 | v25.6,37.36 28.5,37.36 28.79,37.07 arc90 29.06,37.07 29.09,37.1 arc-90 29.35,37.1 29.39,37.06 arc-90 29.39,36.79 29.07,36.47 arc90 29.07,36.2 29.11,36.16 arc90 29.38,36.16 29.7,36.48 arc-90 29.97,36.48 30,36.45 arc-90 30,36.18 29.68,35.86 arc90 29.68,35.59 29.72,35.55 arc90 29.99,35.55 30.31,35.87 arc-90 30.58,35.87 30.62,35.83 arc-90 30.62,35.56 30.3,35.24 arc90 30.3,34.98 30.34,34.94 arc90 30.6,34.94 30.92,35.26 arc-90 31.19,35.26 31.23,35.22 arc-90 31.23,34.95 31.2,34.93 arc90 31.2,34.66 31.39,34.47
  Bottom 0.127: 31.39,34.47 32.56,34.47 34.76,36.66 37.22,36.66
DDR_A1  (via drill 0.25)
  Top 0.125: U$1.H1 36.76,29.46 36.68,29.38 30.81,29.38 29.89,30.3 arc90 29.62,30.3 29.48,30.15 arc-90 29.21,30.15 29.15,30.21 arc-90 29.15,30.48 29.3,30.62 arc90 29.3,30.89 29.24,30.95 arc90 28.97,30.95 28.83,30.8 arc-90 28.56,30.8 28.5,30.86 arc-90 28.5,31.13 28.65,31.28 arc90 28.65,31.54 28.59,31.6 arc90 28.32,31.6 28.18,31.45 arc-90 27.91,31.45 27.85,31.51 arc-90 27.85,31.78 28,31.93 arc90 28,32.2 27.94,32.25 arc90 27.67,32.25 27.52,32.1 arc-90 27.25,32.1 27.2,32.16 arc-90 27.2,32.43 27.34,32.58 arc90 27.34,32.85 27.29,32.9 arc90 27.02,32.9 26.87,32.76 arc-90 26.6,32.76 26.55,32.81 arc-90 26.55,33.08 26.69,33.23 arc90 26.69,33.5 26.53,33.66 26.53,34.07 26.39,34.22 24.36,34.22 24.31,34.16 v24.28,34.16 | U5.P7 25.96,41.18 25.57,41.57 25.57,42.18 v25.57,42.19
  Bottom 0.125: v25.57,42.19 25.57,41.52 24.61,40.56 24.61,37.73 24.11,37.22 24.11,34.34 v24.28,34.16
DDR_A2  (via drill 0.25)
  Top 0.125: U$1.E4 40.03,32.26 v40.01,32.26 | v23.98,38.23 25.48,38.23 U5.P3
  Bottom 0.125: v40.01,32.26 39.62,31.88 | 35.74,29.29 27.69,29.29 23.65,33.33 23.65,37.99 23.89,38.23 v23.98,38.23
  Bottom 0.127: 35.74,29.29 37.52,31.06 38.73,31.06 arc90 38.81,31.14 38.81,31.27 arc90 38.73,31.34 38.08,31.34 arc-90 38,31.42 38,31.52 arc-90 38.08,31.6 38.28,31.6 arc90 38.38,31.7 38.38,31.88 arc-90 38.48,31.98 38.63,31.98 arc-90 38.73,31.88 38.73,31.8 arc90 38.81,31.73 38.98,31.73 39.05,31.8 39.55,31.8 39.62,31.88
DDR_A3  (via drill 0.25)
  Top 0.125: U$1.C3 39.26,33.1 v39.24,33.1 | v25.6,35.53 25.6,35.95 25.57,35.98 25.57,36.54 U5.N2